# Altium PCB Sitara_Project_Rev_A.PcbDoc (part 1 of 5)
Units mm, origin at the board's own origin, x right, y up, seen from the top; angles counter-clockwise.
Board outline 120 x 85 mm, 8 copper layers (L1 (Sig), L2 (GND), L3 (PWR), L4 (Sig), L5 (GND), L6 (Sig), L7 (GND), L8 (Sig)), stack 1.188 mm thick; 515 components, 404 nets, 2043 pads, 82 vias.
Unrouted connection lines stored in the file: 1274.
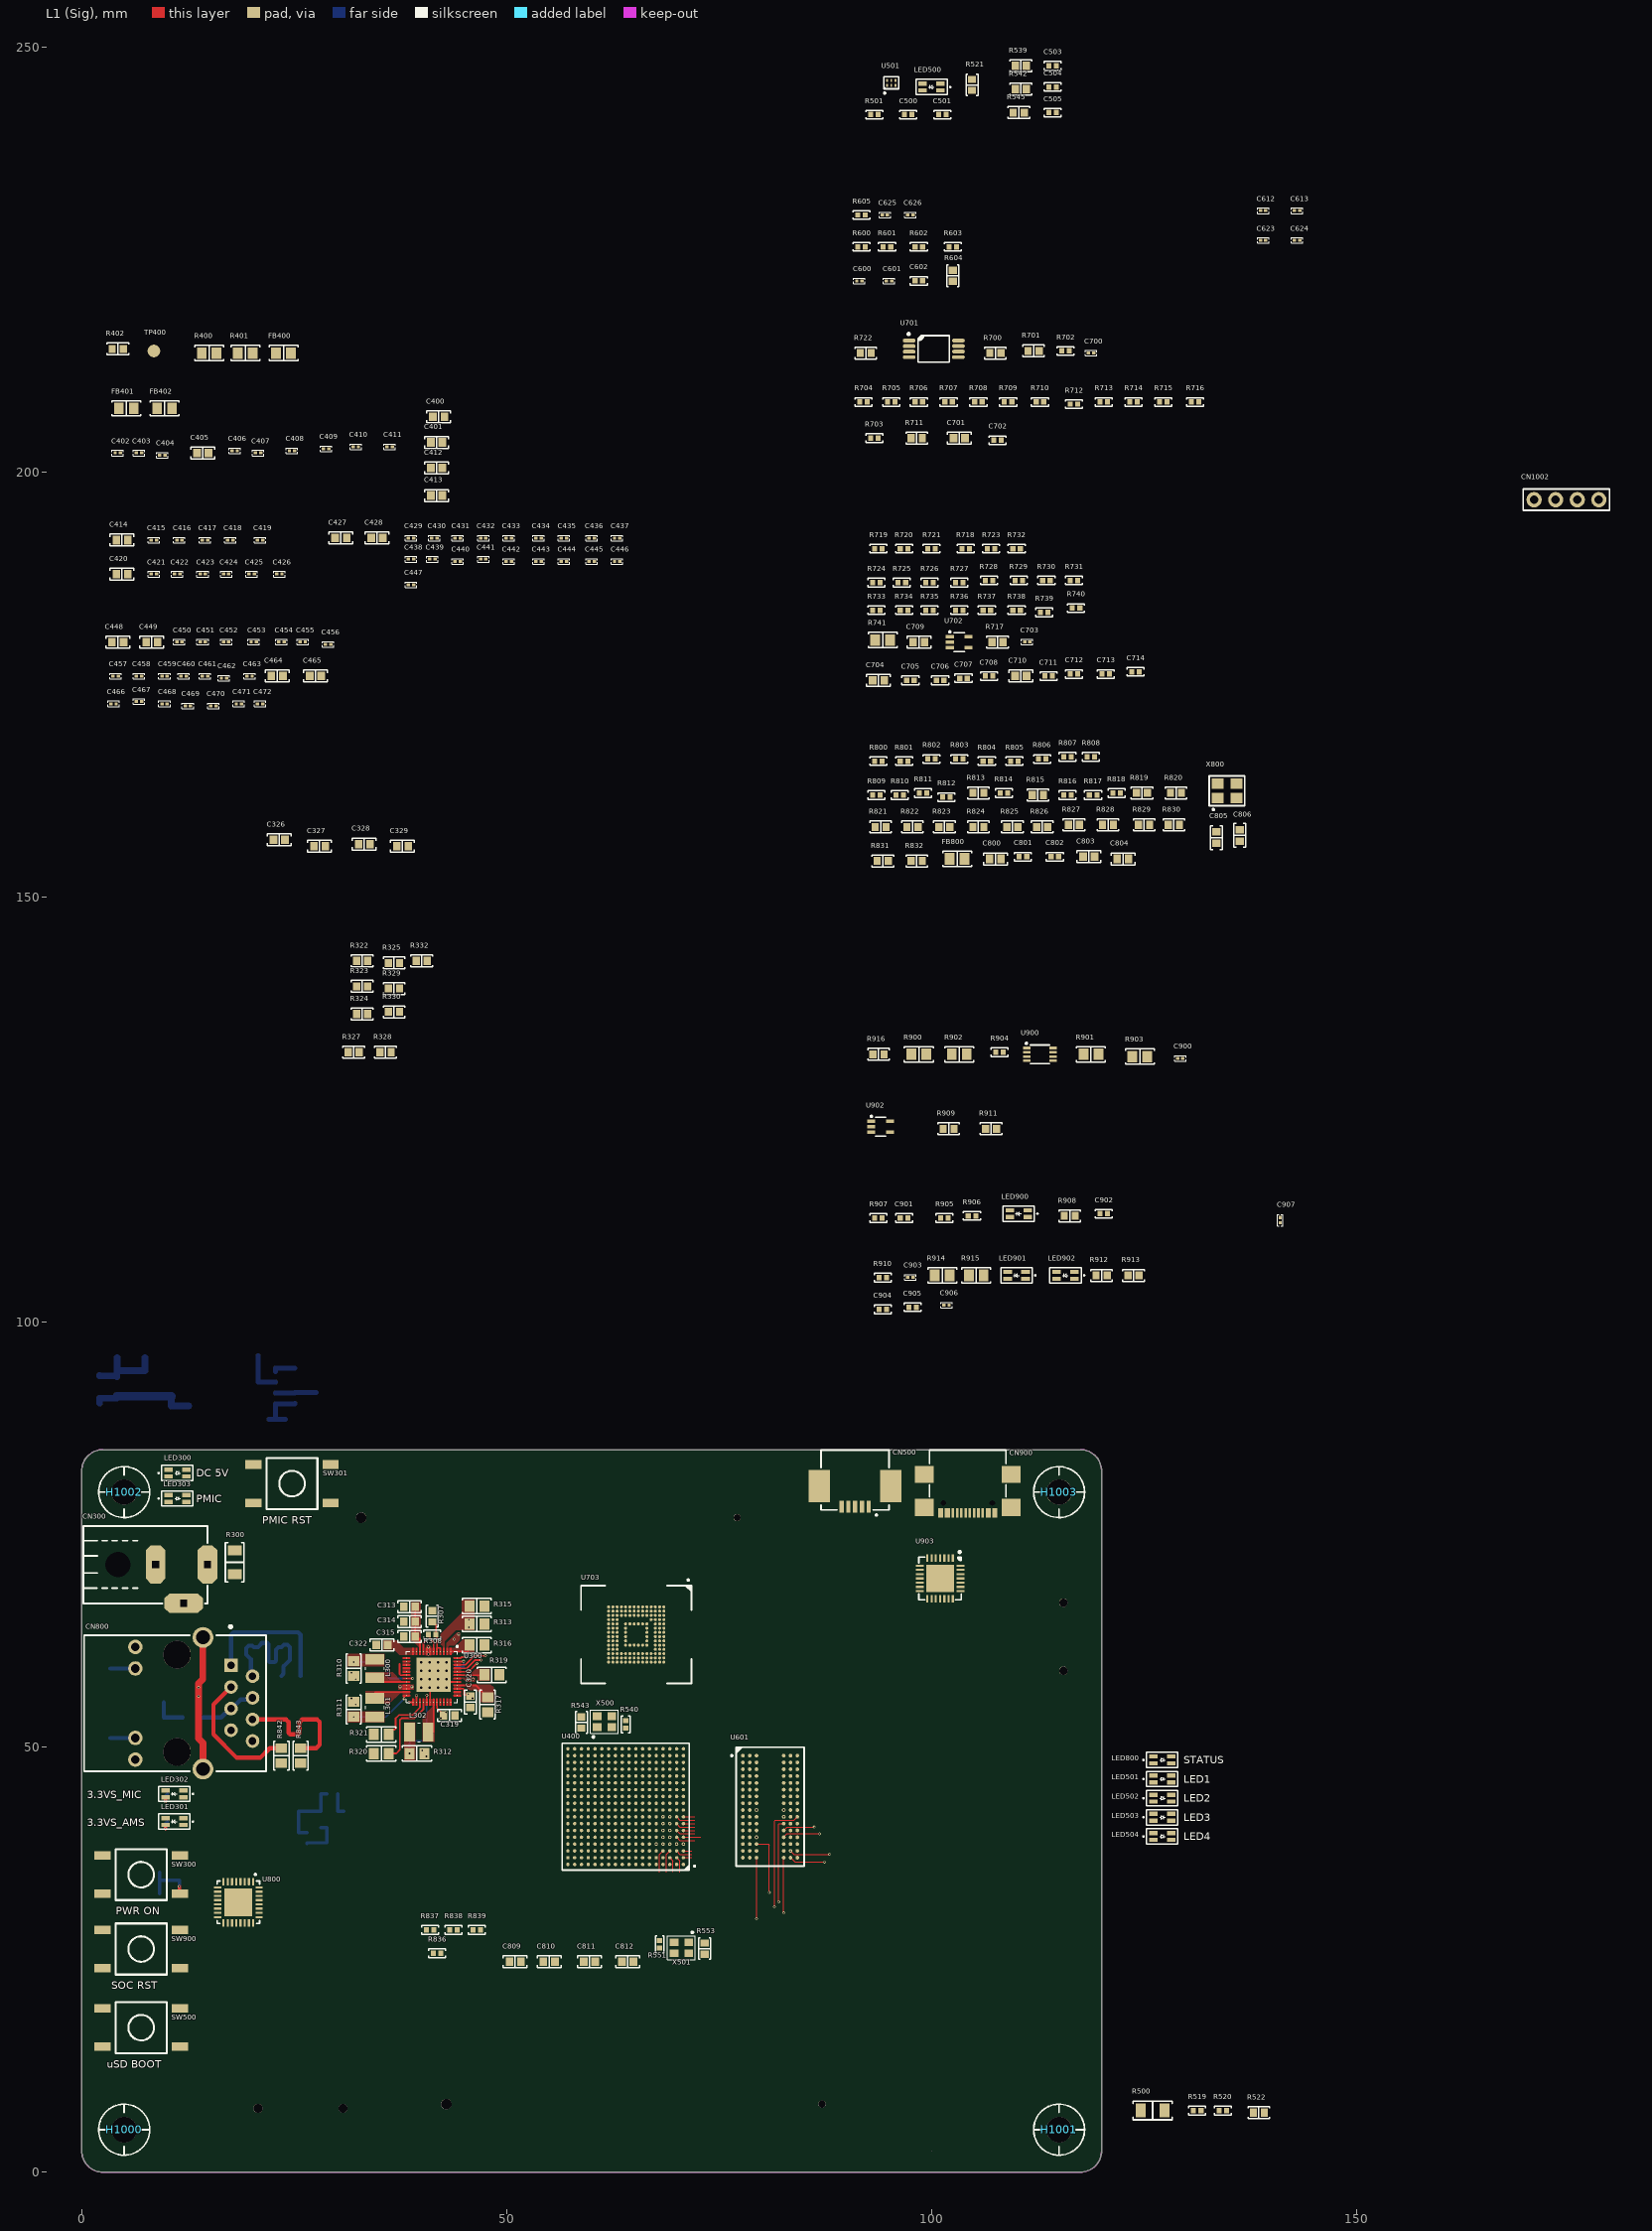
[diagram p0: L1 (Sig) view]
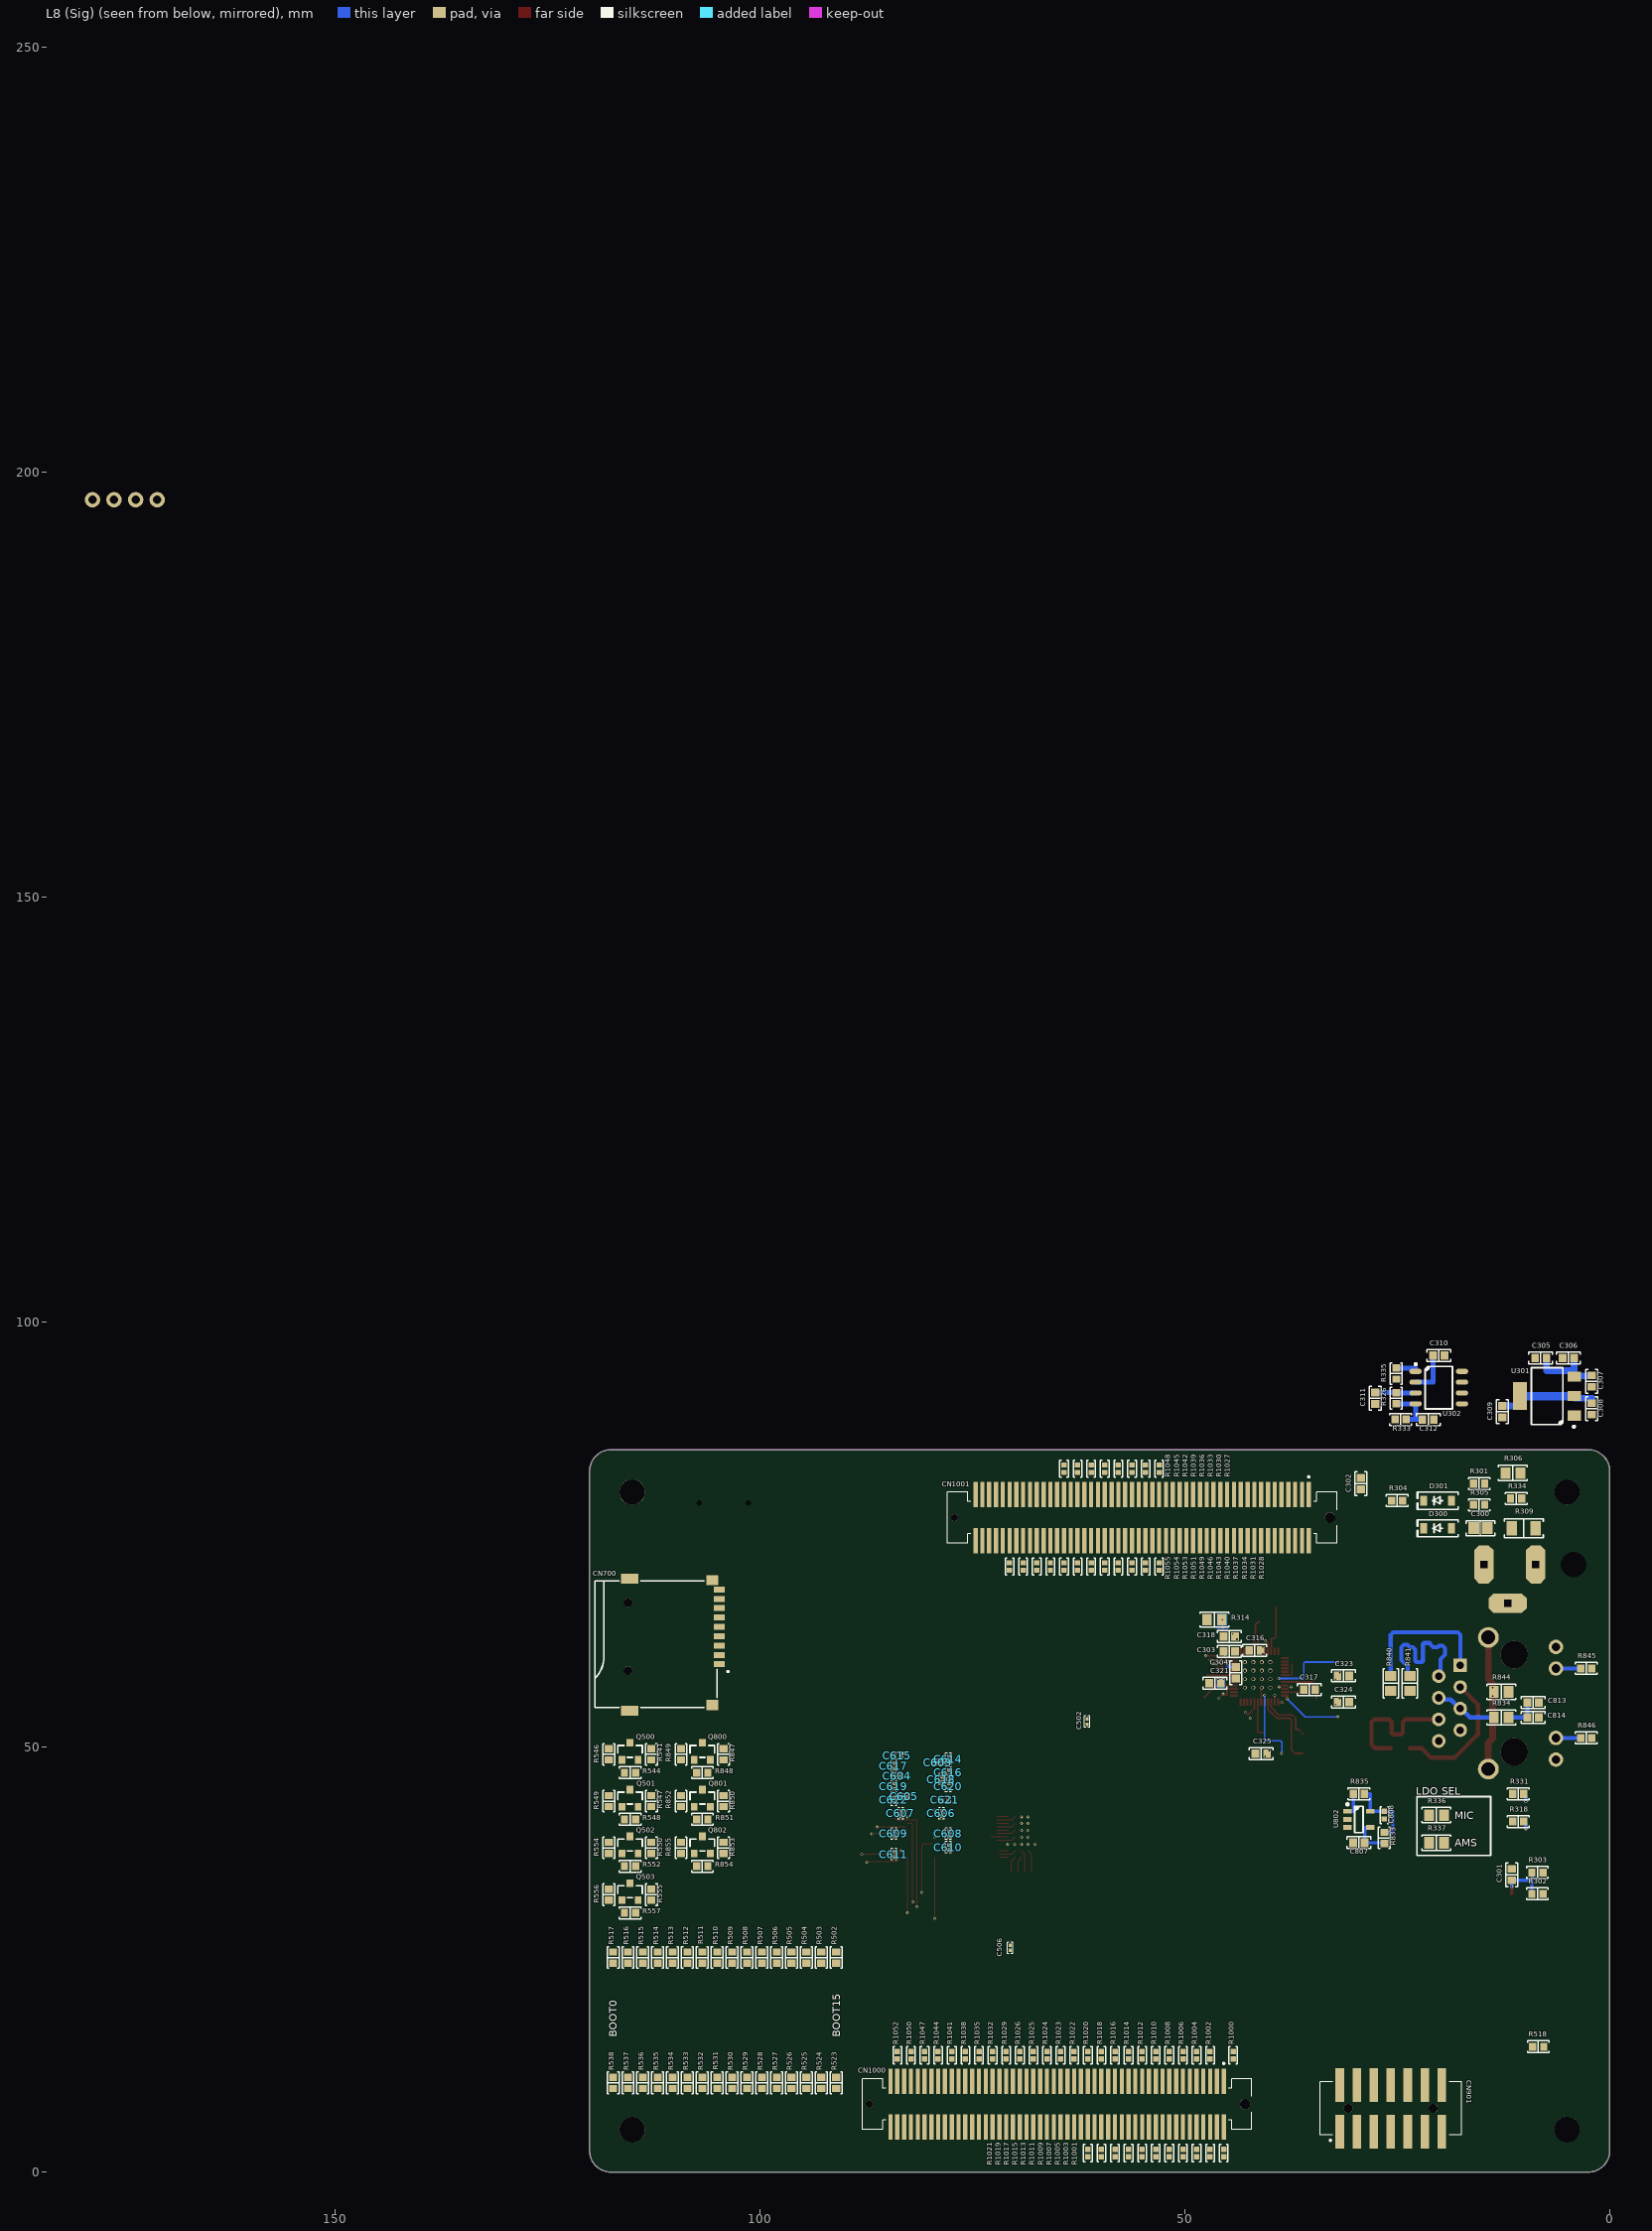
[diagram p1: L8 (Sig) view, seen from below]
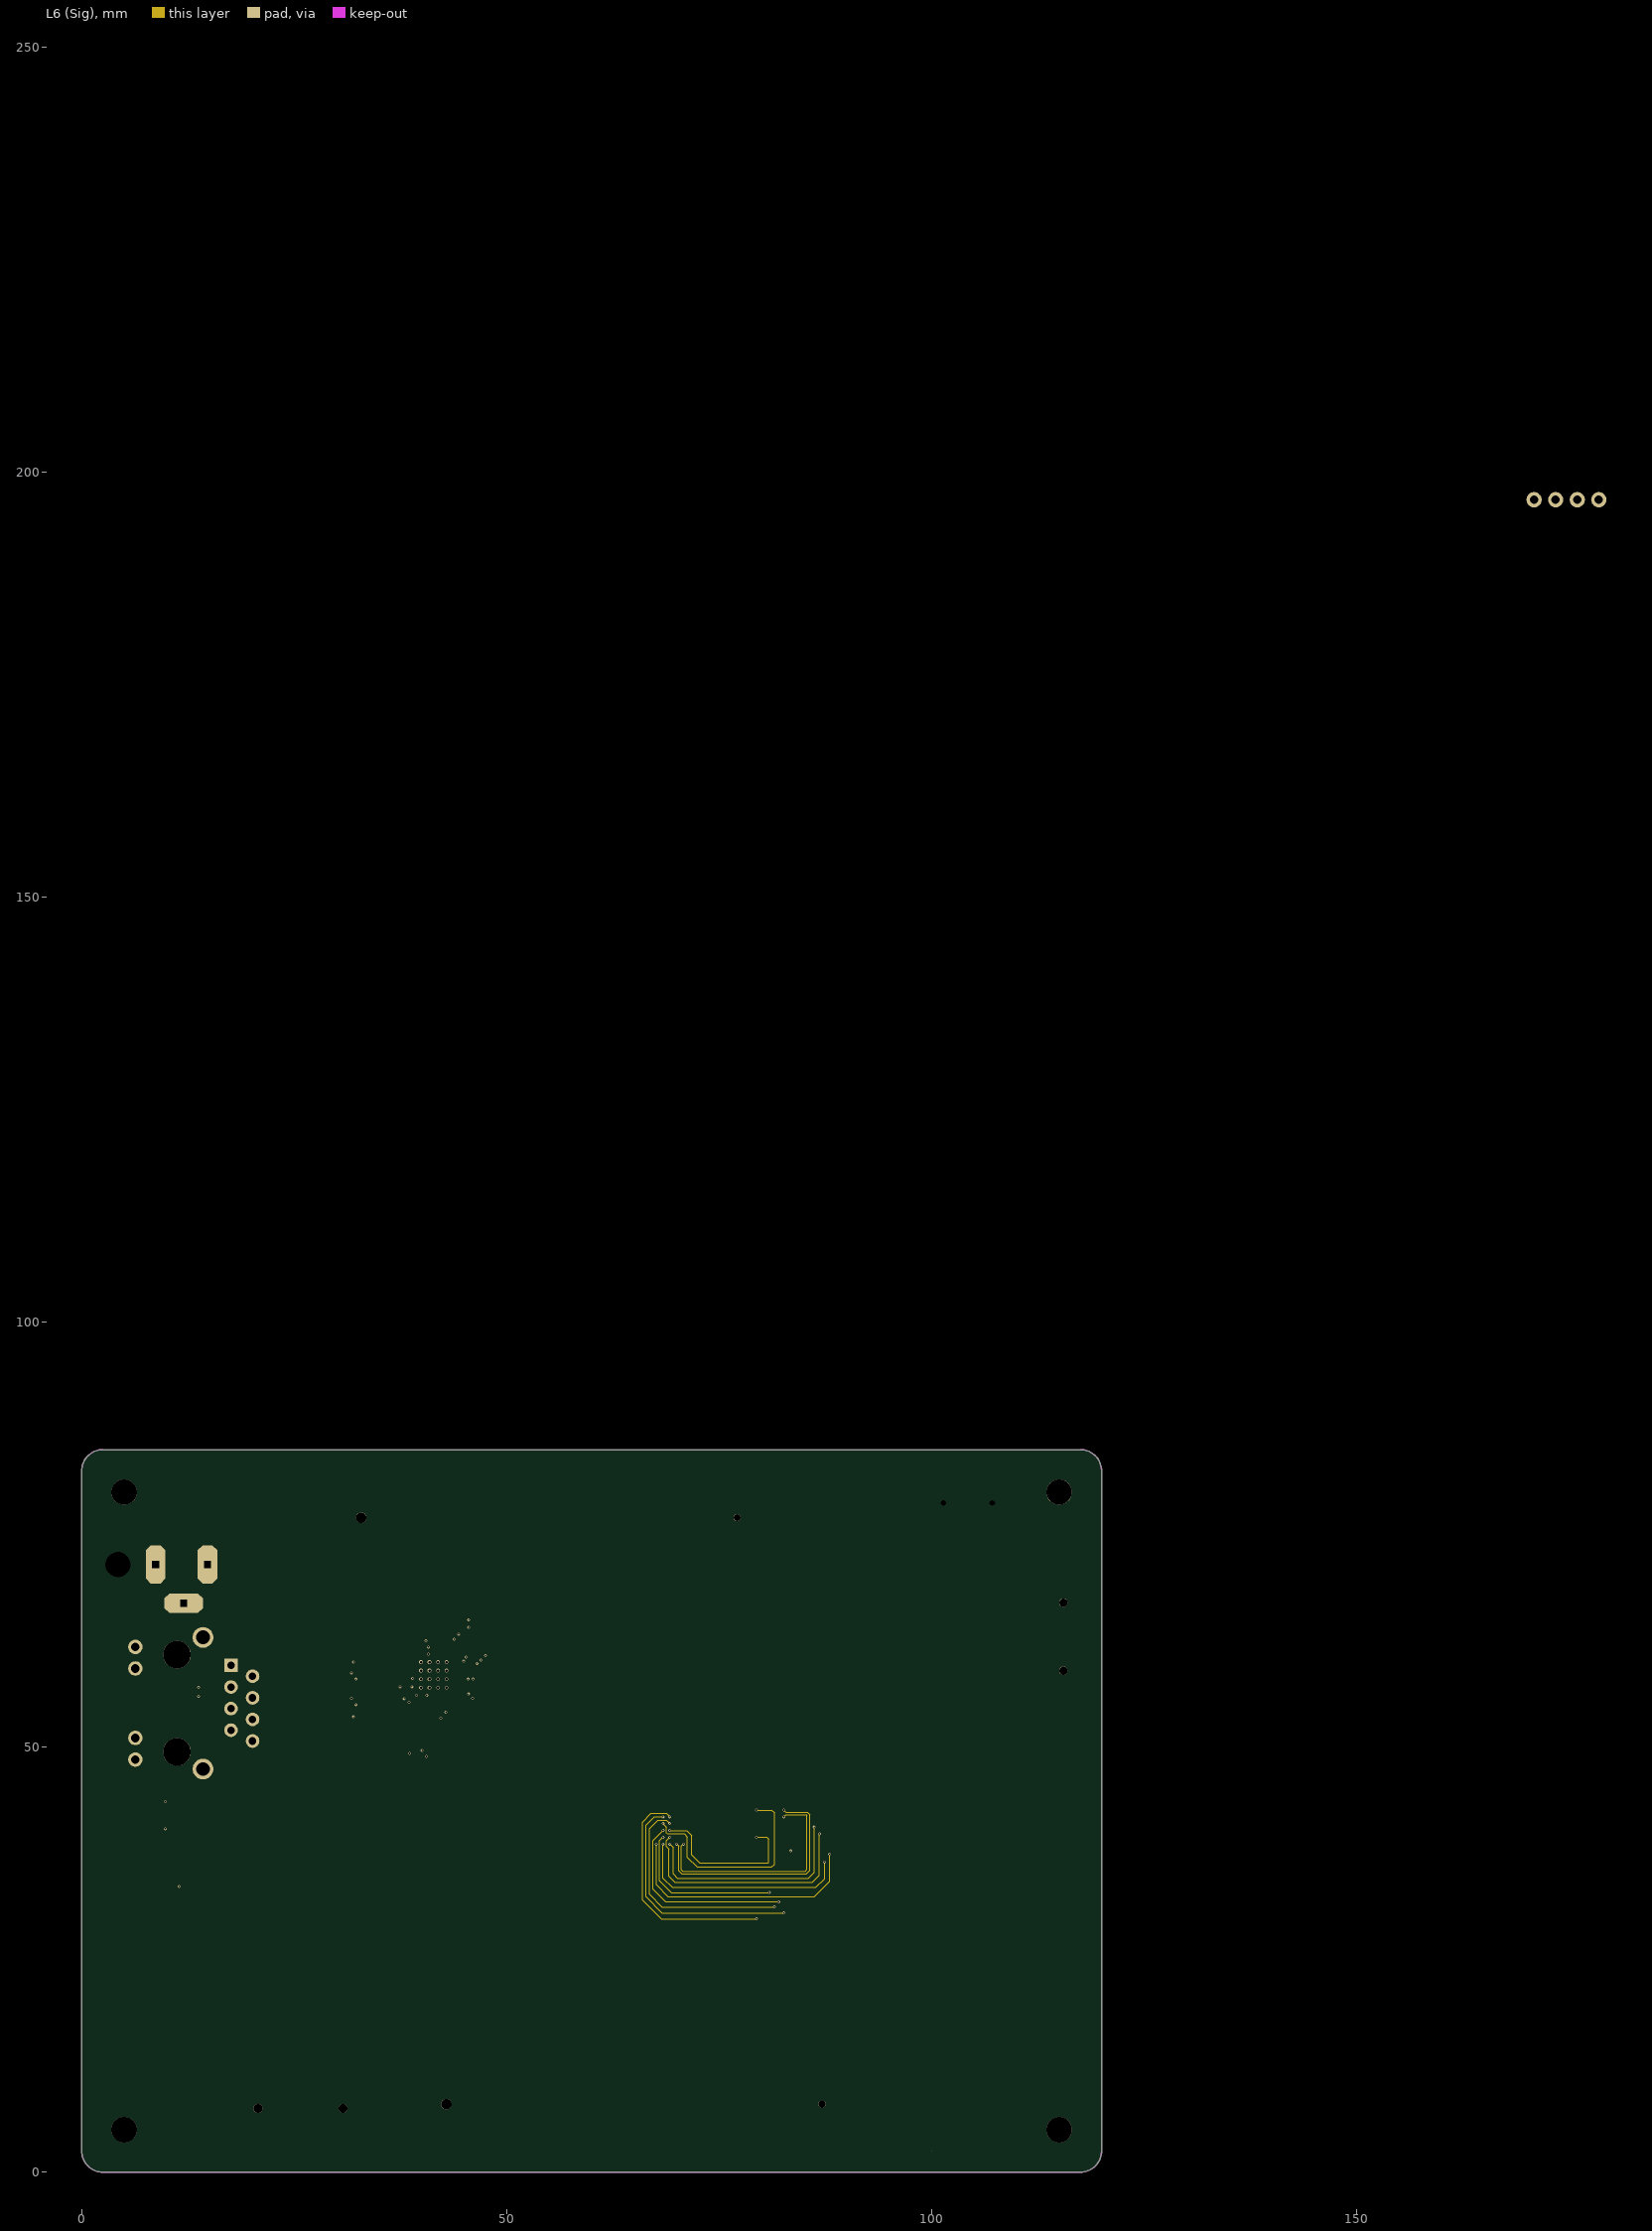
[diagram p2: L6 (Sig)]

## Layer stack, top to bottom
Top Mask: solder mask 0.015, Solder Resist, Dk 3.8
L1 (Sig): signal copper 0.035
Dielectric 1: prepreg 0.0764, 1080, Dk 3.91
L2 (GND): signal copper 0.0152
Core 1: core 0.1, FR-4, Dk 4.6
L3 (PWR): signal copper 0.0152
Dielectric 2: prepreg 0.2104, 7628, Dk 4.4
Dielectric 3: prepreg 0.0764, 1080, Dk 3.91
L4 (Sig): signal copper 0.0152
Core 2: core 0.1, FR-4, Dk 4.6
L5 (GND): signal copper 0.0152
Dielectric 4: prepreg 0.0764, 1080, Dk 3.91
Dielectric 5: prepreg 0.2104, 7628, Dk 4.4
L6 (Sig): signal copper 0.0152
Core 3: core 0.1, FR-4, Dk 4.6
L7 (GND): signal copper 0.0152
Dielectric 6: prepreg 0.0764, 1080, Dk 3.91
L8 (Sig): signal copper 0.035
Bottom Mask: solder mask 0.015, Solder Resist, Dk 3.8

## Board outline
2.5,0 cw(c2.5,2.5) 0,2.5 0,82.5 cw(c2.5,82.5) 2.5,85 117.5,85 cw(c117.5,82.5) 120,82.5 120,2.5 cw(c117.5,2.5) 117.5,0

## Design rules (kind name [scope] priority, off if disabled: settings)
BoardOutlineClearance [All] p1: gap=0.2 ignorepadtopadclearanceinfootprint=FALSE except(0.4: Arc-SplitBarrior Arc-SplitContinuation Track-SplitBarrior Track-SplitContinuation SMDPad-SplitBarrior SMDPad-SplitContinuation THPad-SplitBarrior THPad-SplitContinuation Via-SplitBarrior Via-SplitContinuation Fill-SplitBarrior Fill-SplitContinuation Poly-SplitBarrior Poly-SplitContinuation Region-SplitBarrior Region-SplitContinuation Text-SplitBarrior Text-SplitContinuation)
Clearance "Clearance Bottom Layer" [OnLayer('Bottom Layer')] p1: gap=0.203 ignorepadtopadclearanceinfootprint=TRUE except(0.254: Arc-Text Track-Text SMDPad-Text THPad-Text Via-Text Fill-Text Poly-Text Region-Text Text-Text)
Clearance "Clearance Top Layer" [OnLayer('Top Layer')] p2: gap=0.203 ignorepadtopadclearanceinfootprint=TRUE except(0.254: Arc-Text Track-Text SMDPad-Text THPad-Text Via-Text Fill-Text Poly-Text Region-Text Text-Text)
Clearance [All] p3: gap=0.2 ignorepadtopadclearanceinfootprint=FALSE except(0.1: Arc-Arc Arc-Track Arc-SMDPad Track-Track Track-SMDPad SMDPad-SMDPad; 0.127: Arc-Via Track-Via SMDPad-Via THPad-Via Via-Via; 0.198: Arc-Fill Arc-Poly Arc-Region Track-Fill Track-Poly Track-Region; 0.254: Arc-Text Track-Text SMDPad-Text THPad-Text Via-Text Fill-Text Fill-Hole Poly-Text Poly-Hole Region-Text Region-Hole Text-Text)
ComponentClearance [InComponent('C1000')] p1: gap=0.254 collisioncheckmode=3 verticalgap=0.254 showdistances=FALSE donotcheckwithout3dbody=TRUE
DiffPairsRouting [All] p1: maxlimit=0.254 minlimit=0.1 mostfreqgap=0.2 toplayer_minwidth=0.089 toplayer_maxwidth=0.4 toplayer_prefwidth=0.1 midlayer1_minwidth=0.089 midlayer1_maxwidth=0.4 midlayer1_prefwidth=0.1 midlayer2_minwidth=0.089 midlayer2_maxwidth=0.4 midlayer2_prefwidth=0.1 midlayer3_minwidth=0.089 midlayer3_maxwidth=0.4 midlayer3_prefwidth=0.1 midlayer4_minwidth=0.089 midlayer4_maxwidth=0.4 midlayer4_prefwidth=0.1 midlayer5_minwidth=0.089 midlayer5_maxwidth=0.4 midlayer5_prefwidth=0.1 midlayer6_minwidth=0.089 midlayer6_maxwidth=0.4 midlayer6_prefwidth=0.1 bottomlayer_minwidth=0.089 bottomlayer_maxwidth=0.4 bottomlayer_prefwidth=0.1 maxuncoupledlength=12.7
HoleSize [All] p1: absolutevalues=TRUE maxlimit=6.3 minlimit=0.2 maxpercent=80.000 minpercent=20.000
MatchedLengths MatchedLengths_DDR_CLOCKS_STROBES [InxSignalClass('ADDR_PP1') OR InxSignalClass('DATA_BL0') OR InxSignalClass('DATA_BL1')] p1: tolerance=0 checknetsindiffpair=TRUE checkdiffpairvsdiffpair=FALSE checkxsignals=FALSE checkothers=FALSE
MatchedLengths MatchedLengths_DATA_BL1_1 [InxSignalClass('DATA_BL1')] p2: tolerance=0 checknetsindiffpair=FALSE checkdiffpairvsdiffpair=TRUE checkxsignals=TRUE checkothers=TRUE
MatchedLengths MatchedLengths_DATA_BL0_1 [InxSignalClass('DATA_BL0')] p3: tolerance=0 checknetsindiffpair=FALSE checkdiffpairvsdiffpair=TRUE checkxsignals=TRUE checkothers=TRUE
MatchedLengths MatchedLengths_ADDR_PP1_1 [InxSignalClass('ADDR_PP1')] p4: tolerance=0 checknetsindiffpair=FALSE checkdiffpairvsdiffpair=TRUE checkxsignals=TRUE checkothers=TRUE
MatchedLengths MatchLengths_xSignals_U400_U601 [InxSignalClass('xSignals_U400_U601_MatchLengthsClass')] p5: tolerance=2.54 checknetsindiffpair=FALSE checkdiffpairvsdiffpair=TRUE checkxsignals=TRUE checkothers=TRUE
MatchedLengths "Schematic Matched Net Lengths_10" [InNetClass('MII1_TX')] p6: tolerance=25.4 checknetsindiffpair=FALSE checkdiffpairvsdiffpair=TRUE checkxsignals=TRUE checkothers=TRUE usedelayunits=TRUE delaytolerance=10.000000
MatchedLengths "Schematic Matched Net Lengths_9" [InNetClass('MII1_RX')] p7: tolerance=25.4 checknetsindiffpair=FALSE checkdiffpairvsdiffpair=TRUE checkxsignals=TRUE checkothers=TRUE usedelayunits=TRUE delaytolerance=10.000000
MatchedLengths "Schematic Matched Net Lengths_8" [InNet('PHY_TX_P')] p8: tolerance=25.4 checknetsindiffpair=TRUE checkdiffpairvsdiffpair=FALSE checkxsignals=FALSE checkothers=FALSE usedelayunits=TRUE delaytolerance=10.000000
MatchedLengths "Schematic Matched Net Lengths_7" [InNet('PHY_TX_N')] p9: tolerance=25.4 checknetsindiffpair=TRUE checkdiffpairvsdiffpair=FALSE checkxsignals=FALSE checkothers=FALSE usedelayunits=TRUE delaytolerance=10.000000
MatchedLengths "Schematic Matched Net Lengths_6" [InNetClass('MMC1_eMMC')] p10: tolerance=25.4 checknetsindiffpair=FALSE checkdiffpairvsdiffpair=TRUE checkxsignals=TRUE checkothers=TRUE usedelayunits=TRUE delaytolerance=10.000000
MatchedLengths "Schematic Matched Net Lengths_5" [InNetClass('DDR_BL0')] p11: tolerance=25.4 checknetsindiffpair=FALSE checkdiffpairvsdiffpair=TRUE checkxsignals=TRUE checkothers=TRUE usedelayunits=TRUE delaytolerance=10.000000
MatchedLengths "Schematic Matched Net Lengths_4" [InNetClass('MMC0_MICRO_SD')] p12: tolerance=25.4 checknetsindiffpair=FALSE checkdiffpairvsdiffpair=TRUE checkxsignals=TRUE checkothers=TRUE usedelayunits=TRUE delaytolerance=10.000000
MatchedLengths "Schematic Matched Net Lengths_3" [InNetClass('DDR_BL1')] p13: tolerance=25.4 checknetsindiffpair=FALSE checkdiffpairvsdiffpair=TRUE checkxsignals=TRUE checkothers=TRUE usedelayunits=TRUE delaytolerance=10.000000
MatchedLengths "Schematic Matched Net Lengths_2" [InNet('PHY_RX_P')] p14: tolerance=25.4 checknetsindiffpair=TRUE checkdiffpairvsdiffpair=FALSE checkxsignals=FALSE checkothers=FALSE usedelayunits=TRUE delaytolerance=10.000000
MatchedLengths "Schematic Matched Net Lengths_1" [InNet('PHY_RX_N')] p15: tolerance=25.4 checknetsindiffpair=TRUE checkdiffpairvsdiffpair=FALSE checkxsignals=FALSE checkothers=FALSE usedelayunits=TRUE delaytolerance=10.000000
MatchedLengths "Schematic Matched Net Lengths" [InNetClass('DDR_ACC')] p16: tolerance=25.4 checknetsindiffpair=FALSE checkdiffpairvsdiffpair=TRUE checkxsignals=TRUE checkothers=TRUE usedelayunits=TRUE delaytolerance=10.000000
MatchedLengths MatchedLengths_DDR_CLOCKS_STROBES2 [InxSignalClass('ADDR_PP1_1') OR InxSignalClass('DATA_BL0') OR InxSignalClass('DATA_BL1')] p17: tolerance=0 checknetsindiffpair=TRUE checkdiffpairvsdiffpair=FALSE checkxsignals=FALSE checkothers=FALSE usedelayunits=TRUE delaytolerance=1.000000
MatchedLengths MatchedLengths_DATA_BL1 [InxSignalClass('DATA_BL1')] p18: tolerance=0 checknetsindiffpair=FALSE checkdiffpairvsdiffpair=TRUE checkxsignals=TRUE checkothers=TRUE usedelayunits=TRUE delaytolerance=10.000000
MatchedLengths MatchedLengths_DATA_BL0 [InxSignalClass('DATA_BL0')] p19: tolerance=0 checknetsindiffpair=FALSE checkdiffpairvsdiffpair=TRUE checkxsignals=TRUE checkothers=TRUE usedelayunits=TRUE delaytolerance=10.000000
MatchedLengths MatchedLengths_ADDR_PP2 [InxSignalClass('ADDR_PP2')] p20: tolerance=0 checknetsindiffpair=FALSE checkdiffpairvsdiffpair=TRUE checkxsignals=TRUE checkothers=TRUE usedelayunits=TRUE delaytolerance=10.000000
MatchedLengths MatchedLengths_DDR_CLOCKS_STROBES1 [InxSignalClass('ADDR_PP1') OR InxSignalClass('DATA_BL0') OR InxSignalClass('DATA_BL1')] p21: tolerance=0 checknetsindiffpair=TRUE checkdiffpairvsdiffpair=FALSE checkxsignals=FALSE checkothers=FALSE usedelayunits=TRUE delaytolerance=1.000000
MatchedLengths MatchedLengths_DATA_BL3 [InxSignalClass('DATA_BL3')] p22: tolerance=0 checknetsindiffpair=FALSE checkdiffpairvsdiffpair=TRUE checkxsignals=TRUE checkothers=TRUE usedelayunits=TRUE delaytolerance=10.000000
MatchedLengths MatchedLengths_DATA_BL2 [InxSignalClass('DATA_BL2')] p23: tolerance=0 checknetsindiffpair=FALSE checkdiffpairvsdiffpair=TRUE checkxsignals=TRUE checkothers=TRUE usedelayunits=TRUE delaytolerance=10.000000
MatchedLengths MatchedLengths_ADDR_PP1 [InxSignalClass('ADDR_PP1')] p24: tolerance=0 checknetsindiffpair=FALSE checkdiffpairvsdiffpair=TRUE checkxsignals=TRUE checkothers=TRUE usedelayunits=TRUE delaytolerance=10.000000
MinimumAnnularRing [All] p1: minimumring=0.076
MinimumSolderMaskSliver [All] p1: minsoldermaskwidth=0.1
PolygonConnect Default [All] p1: connectstyle=Direct reliefconductorwidth=0.508 reliefentries=4 polygonreliefangle="90 Angle" airgapwidth=0.254
RoutingCorners [All] p1: cornerstyle=Round minsetback=2.54 maxsetback=2.54
RoutingTopology RoutingTopology_DDRAddressAndControls [InNetClass('DDR_AddressAndControls')] p1: topology=Daisy_Simple
RoutingTopology [All] p2: topology=Shortest
RoutingVias [All] p1: holewidth=0.2 width=0.35 viastyle="Through Hole" minholewidth=0.2 minwidth=0.25 maxholewidth=1 maxwidth=2
SilkToSilkClearance [All] p1: silktosilkclearance=0.1
SilkToSolderMaskClearance [IsPad] p1: minsilkscreentomaskgap=0.1 clearancetoexposedcopper=TRUE
SolderMaskExpansion [All] p1: expansion=0.102 istentingtop=FALSE
Width [All] p1: maxlimit=2.54 minlimit=0.089 preferedwidth=0.2
22 further rules are at their usual default settings.

## Classes and differential pairs
net class MII1_TX: MII1_TXCLK MII1_TXD0 MII1_TXD1 MII1_TXD2 MII1_TXD3 MII1_TXEN
net class MII1_RX: PHY_RXCLK PHY_RXD0/MODE0 PHY_RXD1/MODE1 PHY_RXD2/RMIISEL PHY_RXD3/PHYAD2 PHY_RXDV PHY_RXER/PHYAD0
differential pair class USB_Mini_B_DIFF90: USB0_D
differential pair class USB9_DIFF90: USB9_D
differential pair class PHY_TX: PHY_TX
differential pair class PHY_RX: PHY_RX
differential pair class DIFF_DDR_DQS1: DDR_DQS1
differential pair class DIFF_DDR_DQS0: DDR_DQS0
differential pair class DIFF_DDR_CK: DDR_CK
net class MMC1_eMMC: eMMC_DAT0 eMMC_DAT1 eMMC_DAT2 eMMC_DAT3 eMMC_DAT4 eMMC_DAT5 eMMC_DAT6 eMMC_DAT7 MMC1_CLK MMC1_CMD
net class MMC0_MICRO_SD: MICRO_SD_CLK MICRO_SD_CMD MICRO_SD_DAT0 MICRO_SD_DAT1 MICRO_SD_DAT2 MICRO_SD_DAT3
net class DDR_BL1: DDR_DQ8 DDR_DQ9 DDR_DQ10 DDR_DQ11 DDR_DQ12 DDR_DQ13 DDR_DQ14 DDR_DQ15 DDR_DQM1 DDR_DQS1_N DDR_DQS1_P
net class DDR_BL0: DDR_DQ0 DDR_DQ1 DDR_DQ2 DDR_DQ3 DDR_DQ4 DDR_DQ5 DDR_DQ6 DDR_DQ7 DDR_DQM0 DDR_DQS0_N DDR_DQS0_P
net class DDR_ACC: DDR_A0 DDR_A1 DDR_A2 DDR_A3 DDR_A4 DDR_A5 DDR_A6 DDR_A7 DDR_A8 DDR_A9 DDR_A10 DDR_A11 DDR_A12 DDR_A13 DDR_A14 DDR_A15 DDR_BA0 DDR_BA1 DDR_BA2 DDR_CK_N DDR_CK_P DDR_CKE DDR_NCAS DDR_NCS DDR_NRAS DDR_NRST DDR_NWE DDR_ODT
differential pair USB9_D: +USB9_D_P -USB9_D_N
differential pair USB0_D: +USB0_D_P -USB0_D_N
differential pair PHY_TX: +PHY_TX_P -PHY_TX_N
differential pair PHY_RX: +PHY_RX_P -PHY_RX_N
differential pair DDR_DQS1: +DDR_DQS1_P -DDR_DQS1_N
differential pair DDR_DQS0: +DDR_DQS0_P -DDR_DQS0_N
differential pair DDR_CK: +DDR_CK_P -DDR_CK_N

## Components (designator, comment, footprint, x,y, rotation, side; value= is the part's Value field where it differs from the comment)
C300 "22uF/25V/2012" "CAP 2012 (0805_INCH)" 15.2,75.75 r0 bottom
C301 "100nF/50V/1608" "CAP 1608 (0603_INCH)" 11.5,35 r270 bottom
C302 "100nF/50V/1608" "CAP 1608 (0603_INCH)" 29.25,81 r270 bottom
C303 "100nF/50V/1608" "CAP 1608 (0603_INCH)" 44.75,61.25 r0 bottom
C304 "10uF/25V/1608" "CAP 1608 (0603_INCH)" 44,58.75 r90 bottom
C305 "10uF/10V/1608" "CAP 1608 (0603_INCH)" 8.1,95.8 r180 bottom
C306 "2.2uF/16V/1608" "CAP 1608 (0603_INCH)" 4.85,95.8 r180 bottom
C307 "100nF/50V/1608" "CAP 1608 (0603_INCH)" 2.1,93.05 r90 bottom
C308 "100nF/50V/1608" "CAP 1608 (0603_INCH)" 2.1,89.8 r90 bottom
C309 "10uF/10V/1608" "CAP 1608 (0603_INCH)" 12.6,89.475 r90 bottom
C310 "2.2uF/16V/1608" "CAP 1608 (0603_INCH)" 20.1,96.05 r0 bottom
C311 "100nF/50V/1608" "CAP 1608 (0603_INCH)" 27.6,91.05 r90 bottom
C312 "470pF/50V/1608" "CAP 1608 (0603_INCH)" 21.35,88.55 r0 bottom
C313 "10uF/25V/1608" "CAP 1608 (0603_INCH)" 38.575,66.5 r0 top
C314 "1uF/50V/1608" "CAP 1608 (0603_INCH)" 38.575,64.75 r0 top
C315 "100nF/50V/1608" "CAP 1608 (0603_INCH)" 38.575,63 r0 top
C316 "10uF/25V/1608" "CAP 1608 (0603_INCH)" 41.75,61.4 r180 bottom
C317 "10uF/25V/1608" "CAP 1608 (0603_INCH)" 35.325,56.75 r0 bottom
C318 "10uF/25V/1608" "CAP 1608 (0603_INCH)" 44.75,63 r180 bottom
C319 "10uF/25V/1608" "CAP 1608 (0603_INCH)" 43.25,53.75 r180 top
C320 "10uF/25V/1608" "CAP 1608 (0603_INCH)" 45.75,55.325 r90 top
C321 "10uF/25V/1608" "CAP 1608 (0603_INCH)" 46.425,57.5 r180 bottom
C322 "10uF/25V/1608" "CAP 1608 (0603_INCH)" 35.325,62 r0 top
C323 "10uF/25V/1608" "CAP 1608 (0603_INCH)" 31.325,58.375 r0 bottom
C324 "10uF/25V/1608" "CAP 1608 (0603_INCH)" 31.325,55.32 r0 bottom
C325 "10uF/25V/1608" "CAP 1608 (0603_INCH)" 40.995,49.25 r180 bottom
C326 "2.2uF/16V/1608" "CAP 1608 (0603_INCH)" 23.25,156.75 r180 top
C327 "2.2uF/16V/1608" "CAP 1608 (0603_INCH)" 28,156 r180 top
C328 "10uF/25V/1608" "CAP 1608 (0603_INCH)" 33.25,156.25 r180 top
C329 "10uF/25V/1608" "CAP 1608 (0603_INCH)" 37.75,156 r180 top
C400 "1uF/50V/1608" "CAP 1608 (0603_INCH)" 42,206.5 r180 top
C401 "1uF/50V/1608" "CAP 1608 (0603_INCH)" 41.75,203.5 r180 top
C402 "100nF/25V/0603" "CAP 0603 (0201_INCH)" 4.25,202.25 r180 top
C403 "100nF/25V/0603" "CAP 0603 (0201_INCH)" 6.75,202.25 r180 top
C404 "100nF/25V/0603" "CAP 0603 (0201_INCH)" 9.5,202 r180 top
C405 "1uF/50V/1608" "CAP 1608 (0603_INCH)" 14.25,202.25 r180 top
C406 "100nF/25V/0603" "CAP 0603 (0201_INCH)" 18,202.5 r180 top
C407 "100nF/25V/0603" "CAP 0603 (0201_INCH)" 20.75,202.25 r180 top
C408 "100nF/25V/0603" "CAP 0603 (0201_INCH)" 24.75,202.5 r180 top
C409 "100nF/25V/0603" "CAP 0603 (0201_INCH)" 28.75,202.75 r180 top
C410 "100nF/25V/0603" "CAP 0603 (0201_INCH)" 32.25,203 r180 top
C411 "100nF/25V/0603" "CAP 0603 (0201_INCH)" 36.25,203 r180 top
C412 "1uF/50V/1608" "CAP 1608 (0603_INCH)" 41.75,200.5 r180 top
C413 "1uF/50V/1608" "CAP 1608 (0603_INCH)" 41.75,197.25 r180 top
C414 "10uF/25V/1608" "CAP 1608 (0603_INCH)" 4.75,192 r180 top
C415 "100nF/25V/0603" "CAP 0603 (0201_INCH)" 8.5,192 r180 top
C416 "100nF/25V/0603" "CAP 0603 (0201_INCH)" 11.5,192 r180 top
C417 "100nF/25V/0603" "CAP 0603 (0201_INCH)" 14.5,192 r180 top
C418 "100nF/25V/0603" "CAP 0603 (0201_INCH)" 17.5,192 r180 top
C419 "100nF/25V/0603" "CAP 0603 (0201_INCH)" 21,192 r180 top
C420 "10uF/25V/1608" "CAP 1608 (0603_INCH)" 4.75,188 r180 top
C421 "100nF/25V/0603" "CAP 0603 (0201_INCH)" 8.5,188 r180 top
C422 "100nF/25V/0603" "CAP 0603 (0201_INCH)" 11.25,188 r180 top
C423 "100nF/25V/0603" "CAP 0603 (0201_INCH)" 14.25,188 r180 top
C424 "100nF/25V/0603" "CAP 0603 (0201_INCH)" 17,188 r180 top
C425 "100nF/25V/0603" "CAP 0603 (0201_INCH)" 20,188 r180 top
C426 "100nF/25V/0603" "CAP 0603 (0201_INCH)" 23.25,188 r180 top
C427 "10uF/25V/1608" "CAP 1608 (0603_INCH)" 30.5,192.25 r180 top
C428 "10uF/25V/1608" "CAP 1608 (0603_INCH)" 34.75,192.25 r180 top
C429 "100nF/25V/0603" "CAP 0603 (0201_INCH)" 38.75,192.25 r180 top
C430 "100nF/25V/0603" "CAP 0603 (0201_INCH)" 41.5,192.25 r180 top
C431 "100nF/25V/0603" "CAP 0603 (0201_INCH)" 44.25,192.25 r180 top
C432 "100nF/25V/0603" "CAP 0603 (0201_INCH)" 47.25,192.25 r180 top
C433 "100nF/25V/0603" "CAP 0603 (0201_INCH)" 50.25,192.25 r180 top
C434 "100nF/25V/0603" "CAP 0603 (0201_INCH)" 53.75,192.25 r180 top
C435 "100nF/25V/0603" "CAP 0603 (0201_INCH)" 56.75,192.25 r180 top
C436 "100nF/25V/0603" "CAP 0603 (0201_INCH)" 60,192.25 r180 top
C437 "100nF/25V/0603" "CAP 0603 (0201_INCH)" 63,192.25 r180 top
C438 "100nF/25V/0603" "CAP 0603 (0201_INCH)" 38.75,189.75 r180 top
C439 "100nF/25V/0603" "CAP 0603 (0201_INCH)" 41.25,189.75 r180 top
C440 "100nF/25V/0603" "CAP 0603 (0201_INCH)" 44.25,189.5 r180 top
C441 "100nF/25V/0603" "CAP 0603 (0201_INCH)" 47.25,189.75 r180 top
C442 "100nF/25V/0603" "CAP 0603 (0201_INCH)" 50.25,189.5 r180 top
C443 "100nF/25V/0603" "CAP 0603 (0201_INCH)" 53.75,189.5 r180 top
C444 "100nF/25V/0603" "CAP 0603 (0201_INCH)" 56.75,189.5 r180 top
C445 "100nF/25V/0603" "CAP 0603 (0201_INCH)" 60,189.5 r180 top
C446 "100nF/25V/0603" "CAP 0603 (0201_INCH)" 63,189.5 r180 top
C447 "100nF/25V/0603" "CAP 0603 (0201_INCH)" 38.75,186.75 r180 top
C448 "10uF/25V/1608" "CAP 1608 (0603_INCH)" 4.25,180 r180 top
C449 "10uF/25V/1608" "CAP 1608 (0603_INCH)" 8.25,180 r180 top
C450 "100nF/25V/0603" "CAP 0603 (0201_INCH)" 11.5,180 r180 top
C451 "100nF/25V/0603" "CAP 0603 (0201_INCH)" 14.25,180 r180 top
C452 "100nF/25V/0603" "CAP 0603 (0201_INCH)" 17,180 r180 top
C453 "100nF/25V/0603" "CAP 0603 (0201_INCH)" 20.25,180 r180 top
C454 "100nF/25V/0603" "CAP 0603 (0201_INCH)" 23.5,180 r180 top
C455 "100nF/25V/0603" "CAP 0603 (0201_INCH)" 26,180 r180 top
C456 "100nF/25V/0603" "CAP 0603 (0201_INCH)" 29,179.75 r180 top
C457 "100nF/25V/0603" "CAP 0603 (0201_INCH)" 4,176 r180 top
C458 "100nF/25V/0603" "CAP 0603 (0201_INCH)" 6.75,176 r180 top
C459 "100nF/25V/0603" "CAP 0603 (0201_INCH)" 9.75,176 r180 top
C460 "100nF/25V/0603" "CAP 0603 (0201_INCH)" 12,176 r180 top
C461 "100nF/25V/0603" "CAP 0603 (0201_INCH)" 14.5,176 r180 top
C462 "100nF/25V/0603" "CAP 0603 (0201_INCH)" 16.75,175.75 r180 top
C463 "100nF/25V/0603" "CAP 0603 (0201_INCH)" 19.75,176 r180 top
C464 "10uF/25V/1608" "CAP 1608 (0603_INCH)" 23,176 r180 top
C465 "10uF/25V/1608" "CAP 1608 (0603_INCH)" 27.5,176 r180 top
C466 "100nF/25V/0603" "CAP 0603 (0201_INCH)" 3.75,172.75 r180 top
C467 "100nF/25V/0603" "CAP 0603 (0201_INCH)" 6.75,173 r180 top
C468 "100nF/25V/0603" "CAP 0603 (0201_INCH)" 9.75,172.75 r180 top
C469 "100nF/25V/0603" "CAP 0603 (0201_INCH)" 12.5,172.5 r180 top
C470 "100nF/25V/0603" "CAP 0603 (0201_INCH)" 15.5,172.5 r180 top
C471 "100nF/25V/0603" "CAP 0603 (0201_INCH)" 18.5,172.75 r180 top
C472 "100nF/25V/0603" "CAP 0603 (0201_INCH)" 21,172.75 r180 top
C500 "100nF/50V/1005" "CAP 1005 (0402_INCH)" 97.25,242.05 r180 top
C501 "4.7uF/10V/1005" "CAP 1005 (0402_INCH)" 101.25,242.05 r180 top
C502 "100nF/25V/0603" "CAP 0603 (0201_INCH)" 61.5,53 r90 bottom
C503 "100nF/50V/1005" "CAP 1005 (0402_INCH)" 114.25,247.8 r180 top
C504 "100nF/50V/1005" "CAP 1005 (0402_INCH)" 114.25,245.3 r180 top
C505 "1nF/50V/1005" "CAP 1005 (0402_INCH)" 114.25,242.3 r180 top
C506 "100nF/25V/0603" "CAP 0603 (0201_INCH)" 70.55,26.39 r270 bottom
C600 "47nF/16V/0603" "CAP 0603 (0201_INCH)" 91.5,222.5 r180 top
C601 "47nF/16V/0603" "CAP 0603 (0201_INCH)" 95,222.5 r180 top
C602 "1nF/50V/1005" "CAP 1005 (0402_INCH)" 98.5,222.5 r180 top
C603 "47nF/16V/0603" "CAP 0603 (0201_INCH)" 79,48.2 r180 bottom locked
C604 "47nF/16V/0603" "CAP 0603 (0201_INCH)" 83.8,46.6 r0 bottom
C605 "47nF/16V/0603" "CAP 0603 (0201_INCH)" 83,44.2 r180 bottom
C606 "47nF/16V/0603" "CAP 0603 (0201_INCH)" 78.6,42.2 r270 bottom
C607 "47nF/16V/0603" "CAP 0603 (0201_INCH)" 83.4,42.2 r270 bottom
C608 "47nF/16V/0603" "CAP 0603 (0201_INCH)" 77.8,39.8 r270 bottom
C609 "47nF/16V/0603" "CAP 0603 (0201_INCH)" 84.2,39.8 r270 bottom
C610 "47nF/16V/0603" "CAP 0603 (0201_INCH)" 77.8,38.2 r270 bottom
C611 "47nF/16V/0603" "CAP 0603 (0201_INCH)" 84.2,37.4 r90 bottom
C612 "47nF/16V/0603" "CAP 0603 (0201_INCH)" 139,230.75 r180 top
C613 "47nF/16V/0603" "CAP 0603 (0201_INCH)" 143,230.75 r180 top
C614 "47nF/16V/0603" "CAP 0603 (0201_INCH)" 77.8,48.6 r90 bottom
C615 "47nF/16V/0603" "CAP 0603 (0201_INCH)" 83.8,49 r180 bottom
C616 "47nF/16V/0603" "CAP 0603 (0201_INCH)" 77.8,47 r90 bottom
C617 "47nF/16V/0603" "CAP 0603 (0201_INCH)" 84.2,47.8 r270 bottom
C618 "47nF/16V/0603" "CAP 0603 (0201_INCH)" 78.6,46.2 r90 bottom
C619 "47nF/16V/0603" "CAP 0603 (0201_INCH)" 84.2,45.4 r90 bottom
C620 "47nF/16V/0603" "CAP 0603 (0201_INCH)" 77.8,45.4 r270 bottom
C621 "47nF/16V/0603" "CAP 0603 (0201_INCH)" 78.2,43.8 r0 bottom
C622 "47nF/16V/0603" "CAP 0603 (0201_INCH)" 84.2,43.8 r270 bottom
C623 "47nF/16V/0603" "CAP 0603 (0201_INCH)" 139,227.25 r180 top
C624 "47nF/16V/0603" "CAP 0603 (0201_INCH)" 143,227.25 r180 top
C625 "47nF/16V/0603" "CAP 0603 (0201_INCH)" 94.5,230.25 r180 top
C626 "47nF/16V/0603" "CAP 0603 (0201_INCH)" 97.5,230.25 r180 top
C700 "100nF/25V/0603" "CAP 0603 (0201_INCH)" 118.75,214 r180 top
C701 "10uF/25V/1608" "CAP 1608 (0603_INCH)" 103.25,204 r180 top
C702 "100nF/16V/1005" "CAP 1005 (0402_INCH)" 107.75,203.75 r180 top
C703 "100nF/25V/0603" "CAP 0603 (0201_INCH)" 111.25,180 r180 top
C704 "10uF/10V/1608" "CAP 1608 (0603_INCH)" 93.75,175.5 r180 top
C705 "100nF/16V/1005" "CAP 1005 (0402_INCH)" 97.5,175.5 r180 top
C706 "100nF/16V/1005" "CAP 1005 (0402_INCH)" 101,175.5 r180 top
C707 "100nF/16V/1005" "CAP 1005 (0402_INCH)" 103.75,175.75 r180 top
C708 "100nF/16V/1005" "CAP 1005 (0402_INCH)" 106.75,176 r180 top
C709 "2.2uF/16V/1608" "CAP 1608 (0603_INCH)" 98.5,180 r180 top
C710 "10uF/10V/1608" "CAP 1608 (0603_INCH)" 110.5,176 r180 top
C711 "100nF/16V/1005" "CAP 1005 (0402_INCH)" 113.75,176 r180 top
C712 "100nF/16V/1005" "CAP 1005 (0402_INCH)" 116.75,176.25 r180 top
C713 "100nF/16V/1005" "CAP 1005 (0402_INCH)" 120.5,176.25 r180 top
C714 "100nF/16V/1005" "CAP 1005 (0402_INCH)" 124,176.5 r180 top
C800 "10uF/25V/1608" "CAP 1608 (0603_INCH)" 107.5,154.5 r180 top
C801 "100nF/16V/1005" "CAP 1005 (0402_INCH)" 110.75,154.75 r180 top
C802 "100nF/16V/1005" "CAP 1005 (0402_INCH)" 114.5,154.75 r180 top
C803 "1uF/50V/1608" "CAP 1608 (0603_INCH)" 118.5,154.75 r180 top
C804 "470pF/50V/1608" "CAP 1608 (0603_INCH)" 122.5,154.5 r180 top
C805 "18pF/50V/1608" "CAP 1608 (0603_INCH)" 133.5,157 r90 top
C806 "18pF/50V/1608" "CAP 1608 (0603_INCH)" 136.25,157.25 r90 top
C807 "4.7uF/16V/1608" "CAP 1608 (0603_INCH)" 29.5,38.75 r180 bottom
C808 "100nF/16V/1005" "CAP 1005 (0402_INCH)" 26.5,42.01 r270 bottom
C809 "10pF/50V/1608" "CAP 1608 (0603_INCH)" 51,24.75 r180 top
C810 "10pF/50V/1608" "CAP 1608 (0603_INCH)" 55,24.75 r180 top
C811 "10pF/50V/1608" "CAP 1608 (0603_INCH)" 59.75,24.75 r180 top
C812 "10pF/50V/1608" "CAP 1608 (0603_INCH)" 64.25,24.75 r180 top
C813 "10nF/50V/1608" "CAP 1608 (0603_INCH)" 9,55.25 r180 bottom
C814 "10nF/50V/1608" "CAP 1608 (0603_INCH)" 9,53.5 r180 bottom
C900 "100nF/25V/0603" "CAP 0603 (0201_INCH)" 129.25,131 r180 top
C901 "100nF/16V/1005" "CAP 1005 (0402_INCH)" 96.75,112.25 r180 top
C902 "4.7uF/10V/1005" "CAP 1005 (0402_INCH)" 120.25,112.75 r180 top
C903 "100nF/25V/0603" "CAP 0603 (0201_INCH)" 97.5,105.25 r180 top
C904 "4.7uF/10V/1005" "CAP 1005 (0402_INCH)" 94.25,101.5 r180 top
C905 "1uF/25V/1005" "CAP 1005 (0402_INCH)" 97.75,101.75 r180 top
C906 "100nF/25V/0603" "CAP 0603 (0201_INCH)" 101.75,102 r180 top
C907 "100nF/25V/0603" "CAP 0603 (0201_INCH)" 141,112 r90 top
CN300 "DC_Jack" CON_DC-JACK 14.8,66.9 r90 top locked
CN500 "UX60SC-MB-5ST(80)" "CON_USB2.0-Mini-B (UX60SC-MB-5ST(80))" 91,79.5 r180 top locked
CN700 "TF-01A" CON_MICRO-SD_Socket_TF-01A 110.022,62.05 r270 bottom
CN800 "HR911105A" CON_RJ45 11.22,55.165 r90 top locked
CN900 "MC-311S" "CON USB-Type-C (16P)" 104.25,80.15 r180 top locked
CN901 "0878321420/NC" "CON_NC_BOX_HEADER_DUAL_2x7PIN(2.00MM) (0878321420)" 25.75,7.5 r180 bottom
CN1000 "10144517-101802LF" CON_BergStak-Lite(0.8mm)_MALE-100P(10144517-101802LF)_HandSolder 65,8 r180 bottom locked
CN1001 "10144517-101802LF" CON_BergStak-Lite(0.8mm)_MALE-100P(10144517-101802LF)_HandSolder 55,77 r180 bottom
CN1002 "PH_4P" "CON PIN_HEADER-4PIN(2.54MM)" 178.5,196.75 r180 top
D300 "B5819W" DIO_SOD-123 20.25,75.75 r0 bottom
D301 "B5819W" DIO_SOD-123 20.25,79 r0 bottom
FB400 "BLM21PG121SN1D" "FB 2012 (0805_inch)" 23.75,214 r180 top
FB401 "BLM21PG121SN1D" "FB 2012 (0805_inch)" 5.25,207.5 r180 top
FB402 "BLM21PG121SN1D" "FB 2012 (0805_inch)" 9.75,207.5 r180 top
FB800 "BLM21PG121SN1D" "FB 2012 (0805_inch)" 103,154.5 r180 top
H1000 "NTH-3MM" "HOLE NTH-3MM" 5,5 r0 top locked
H1001 "NTH-3MM" "HOLE NTH-3MM" 115,5 r0 top locked
H1002 "NTH-3MM" "HOLE NTH-3MM" 5,80 r0 top locked
H1003 "NTH-3MM" "HOLE NTH-3MM" 115,80 r0 top locked
L300 "LQM2HPN2R2MG0L" IND_LQM2HPN2R2MG0L 34.5,59.25 r90 top
L301 "LQM2HPN2R2MG0L" IND_LQM2HPN2R2MG0L 34.5,54.66 r270 top
L302 "LQM2HPN2R2MG0L" IND_LQM2HPN2R2MG0L 39.66,51.75 r180 top
LED300 "GREEN/2012" "LED MHT170RGBCT (GREEN)" 11.25,82.25 r0 top
LED301 "GREEN/2012" "LED MHT170RGBCT (GREEN)" 10.9,41.25 r180 top
LED302 "GREEN/2012" "LED MHT170RGBCT (GREEN)" 10.9,44.5 r180 top
LED303 "GREEN/2012" "LED MHT170RGBCT (GREEN)" 11.25,79.25 r0 top
LED500 "GREEN/2012" "LED MHT170RGBCT (GREEN)" 100,245.3 r180 top
LED501 "BLUE/2012" "LED MHT170RGBCT (BLUE)" 127.125,46.25 r0 top
LED502 "BLUE/2012" "LED MHT170RGBCT (BLUE)" 127.125,44 r0 top
LED503 "BLUE/2012" "LED MHT170RGBCT (BLUE)" 127.125,41.75 r0 top
LED504 "BLUE/2012" "LED MHT170RGBCT (BLUE)" 127.125,39.5 r0 top
LED800 "RGB/2012" "LED MHT170RGBCT" 127.125,48.5 r0 top
LED900 "GREEN/2012" "LED MHT170RGBCT (GREEN)" 110.25,112.75 r180 top
LED901 "BLUE/2012" "LED MHT170RGBCT (BLUE)" 110,105.5 r180 top
LED902 "BLUE/2012" "LED MHT170RGBCT (BLUE)" 115.75,105.5 r180 top
Q500 "2N7002" "SOT 23-3 (DIODES INCORPORATED)" 115.25,49.5 r90 bottom
Q501 "2N7002" "SOT 23-3 (DIODES INCORPORATED)" 115.25,44 r90 bottom
Q502 "2N7002" "SOT 23-3 (DIODES INCORPORATED)" 115.25,38.5 r90 bottom
Q503 "2N7002" "SOT 23-3 (DIODES INCORPORATED)" 115.25,33 r90 bottom
Q800 "2N7002" "SOT 23-3 (DIODES INCORPORATED)" 106.75,49.5 r90 bottom
Q801 "2N7002" "SOT 23-3 (DIODES INCORPORATED)" 106.75,44 r90 bottom
Q802 "2N7002" "SOT 23-3 (DIODES INCORPORATED)" 106.75,38.5 r90 bottom
R300 "0R/3216" "RES 3216 (1206_inch)" 18,71.75 r270 top
R301 "100K/1608" "RES 1608 (0603_inch)" 15.35,81 r0 bottom value=100K
R302 "10K/1608/NC" "RES 1608 (0603_inch)/NC" 8.5,32.75 r180 bottom value=10K
R303 "10K/1608/NC" "RES 1608 (0603_inch)/NC" 8.5,35.25 r180 bottom value=10K
R304 "100K/1608" "RES 1608 (0603_inch)" 25,79 r180 bottom value=100K
R305 "100K/1608" "RES 1608 (0603_inch)" 15.35,78.5 r0 bottom value=100K
R306 "680R/2012" "RES 2012 (0805_inch)" 11.375,82.25 r180 bottom value=680R
R307 "4.7K/1608" "RES 1608 (0603_inch)" 41.25,65.4 r90 top value=4.7K
R308 "0R/1005" "RES 1005 (0402_inch)" 41.25,63.25 r0 top value=0R
R309 "0R/3216" "RES 3216 (1206_inch)" 10.1,75.75 r0 bottom
R310 "0R/2012" "RES 2012 (0805_inch)" 32,59.25 r270 top value=0R
R311 "0R/2012" "RES 2012 (0805_inch)" 32,54.445 r90 top value=0R
R312 "0R/2012" "RES 2012 (0805_inch)" 39.445,49.25 r0 top value=0R
R313 "0R/2012" "RES 2012 (0805_inch)" 46.5,64.5 r0 top value=0R
R314 "0R/2012" "RES 2012 (0805_inch)" 46.5,65 r0 bottom value=0R
R315 "0R/2012" "RES 2012 (0805_inch)" 46.5,66.6 r0 top value=0R
R316 "0R/2012" "RES 2012 (0805_inch)" 46.5,62 r0 top value=0R
R317 "0R/2012" "RES 2012 (0805_inch)" 47.75,55 r270 top value=0R
R318 "510R/1608" "RES 1608 (0603_inch)" 10.75,41.25 r180 bottom value=510R
R319 "0R/2012" "RES 2012 (0805_inch)" 48.25,58.5 r0 top value=0R
R320 "1.5K/2012" "RES 2012 (0805_inch)" 35.25,49.25 r180 top value=1.5K
R321 "1.5K/2012" "RES 2012 (0805_inch)" 35.25,51.5 r180 top value=1.5K
R322 "0R/1608" "RES 1608 (0603_inch)" 33,142.5 r180 top value=0R
R323 "0R/1608" "RES 1608 (0603_inch)" 33,139.5 r180 top value=0R
R324 "0R/1608" "RES 1608 (0603_inch)" 33,136.25 r180 top value=0R
R325 "0R/1608" "RES 1608 (0603_inch)" 36.75,142.25 r180 top value=0R
R326 "200K/1608" "RES 1608 (0603_inch)" 25.1,91.05 r90 bottom value=200K
R327 "4.7K/1608" "RES 1608 (0603_inch)" 32,131.75 r180 top value=4.7K
R328 "4.7K/1608" "RES 1608 (0603_inch)" 35.75,131.75 r180 top value=4.7K
R329 "0R/1608" "RES 1608 (0603_inch)" 36.75,139.25 r180 top value=0R
R330 "0R/1608" "RES 1608 (0603_inch)" 36.75,136.5 r180 top value=0R
R331 "510R/1608" "RES 1608 (0603_inch)" 10.75,44.5 r180 bottom value=510R
R332 "0R/1608" "RES 1608 (0603_inch)" 40,142.5 r180 top value=0R
R333 "330K/1608" "RES 1608 (0603_inch)" 24.6,88.55 r180 bottom value=330K
R334 "510R/1608" "RES 1608 (0603_inch)" 11,79.25 r180 bottom value=510R
R335 "0R/1608" "RES 1608 (0603_inch)" 25.1,93.95 r270 bottom value=0R
R336 "0R/2012" "RES 2012 (0805_inch)" 20.375,42 r0 bottom value=0R
R337 "0R/2012/NC" "RES 2012 (0805_INCH)/NC" 20.375,38.75 r0 bottom value=0R
R400 "0R/2012" "RES 2012 (0805_inch)" 15,214 r180 top value=0R
R401 "0R/2012" "RES 2012 (0805_inch)" 19.25,214 r180 top value=0R
R402 "0R/1608/NC" "RES 1608 (0603_inch)/NC" 4.25,214.5 r180 top value=0R
R500 "0R/3216" "RES 3216 (1206_inch)" 126,7.25 r180 top
R501 "1M/1005" "RES 1005 (0402_inch)" 93.25,242.05 r180 top value=1M
R502 "100K/1608/NC" "RES 1608 (0603_inch)/NC" 91,25.25 r90 bottom value=100K
R503 "100K/1608" "RES 1608 (0603_inch)" 92.75,25.25 r90 bottom value=100K
R504 "100K/1608/NC" "RES 1608 (0603_inch)/NC" 94.5,25.25 r90 bottom value=100K
R505 "100K/1608/NC" "RES 1608 (0603_inch)/NC" 96.25,25.25 r90 bottom value=100K
R506 "100K/1608/NC" "RES 1608 (0603_inch)/NC" 98,25.25 r90 bottom value=100K
R507 "100K/1608/NC" "RES 1608 (0603_inch)/NC" 99.75,25.25 r90 bottom value=100K
R508 "100K/1608/NC" "RES 1608 (0603_inch)/NC" 101.5,25.25 r90 bottom value=100K
R509 "100K/1608/NC" "RES 1608 (0603_inch)/NC" 103.25,25.25 r90 bottom value=100K
R510 "100K/1608/NC" "RES 1608 (0603_inch)/NC" 105,25.25 r90 bottom value=100K
R511 "100K/1608/NC" "RES 1608 (0603_inch)/NC" 106.75,25.25 r90 bottom value=100K
R512 "100K/1608" "RES 1608 (0603_inch)" 108.5,25.25 r90 bottom value=100K
R513 "100K/1608" "RES 1608 (0603_inch)" 110.25,25.25 r90 bottom value=100K
R514 "100K/1608" "RES 1608 (0603_inch)" 112,25.25 r90 bottom value=100K
R515 "100K/1608" "RES 1608 (0603_inch)" 113.75,25.25 r90 bottom value=100K
R516 "100K/1608/NC" "RES 1608 (0603_inch)/NC" 115.5,25.25 r90 bottom value=100K
R517 "100K/1608/NC" "RES 1608 (0603_inch)/NC" 117.25,25.25 r90 bottom value=100K
R518 "100R/1608" "RES 1608 (0603_inch)" 8.4,14.75 r0 bottom value=100R
R519 "4.7K/1005" "RES 1005 (0402_inch)" 131.25,7.25 r180 top value=4.7K
R520 "4.7K/1005" "RES 1005 (0402_inch)" 134.25,7.25 r180 top value=4.7K
R521 "1K/1608" "RES 1608 (0603_inch)" 104.75,245.55 r90 top value=1K
R522 "0R/1608" "RES 1608 (0603_inch)" 138.5,7 r180 top value=0R
R523 "100K/1608" "RES 1608 (0603_inch)" 91,10.5 r90 bottom value=100K
R524 "100K/1608/NC" "RES 1608 (0603_inch)/NC" 92.75,10.5 r90 bottom value=100K
R525 "100K/1608" "RES 1608 (0603_inch)" 94.5,10.5 r90 bottom value=100K
R526 "100K/1608" "RES 1608 (0603_inch)" 96.25,10.5 r90 bottom value=100K
R527 "100K/1608" "RES 1608 (0603_inch)" 98,10.5 r90 bottom value=100K
R528 "100K/1608" "RES 1608 (0603_inch)" 99.75,10.5 r90 bottom value=100K
R529 "100K/1608" "RES 1608 (0603_inch)" 101.5,10.5 r90 bottom value=100K
R530 "100K/1608" "RES 1608 (0603_inch)" 103.25,10.5 r90 bottom value=100K
R531 "100K/1608" "RES 1608 (0603_inch)" 105,10.5 r90 bottom value=100K
R532 "100K/1608" "RES 1608 (0603_inch)" 106.75,10.5 r90 bottom value=100K
R533 "100K/1608/NC" "RES 1608 (0603_inch)/NC" 108.5,10.5 r90 bottom value=100K
R534 "100K/1608/NC" "RES 1608 (0603_inch)/NC" 110.25,10.5 r90 bottom value=100K
R535 "100K/1608/NC" "RES 1608 (0603_inch)/NC" 112,10.5 r90 bottom value=100K
R536 "100K/1608/NC" "RES 1608 (0603_inch)/NC" 113.75,10.5 r90 bottom value=100K
R537 "100K/1608" "RES 1608 (0603_inch)" 115.5,10.5 r90 bottom value=100K
R538 "100K/1608" "RES 1608 (0603_inch)" 117.25,10.5 r90 bottom value=100K
R539 "10K/1608" "RES 1608 (0603_inch)" 110.5,247.8 r180 top value=10K
R540 "0R/1005" "RES 1005 (0402_inch)" 64,52.69 r270 top value=0R
R541 "470R/1608" "RES 1608 (0603_inch)" 112.75,49.15 r270 bottom value=470R
R542 "0R/1608" "RES 1608 (0603_inch)" 110.5,245.05 r180 top value=0R
R543 "0R/1608" "RES 1608 (0603_inch)" 58.8,52.9 r270 top value=0R
R544 "12K/1608" "RES 1608 (0603_inch)" 115.25,47 r0 bottom value=12K
R545 "0R/1608" "RES 1608 (0603_inch)" 110.25,242.3 r180 top value=0R
R546 "22R/1608" "RES 1608 (0603_inch)" 117.75,49.15 r270 bottom value=22R
R547 "470R/1608" "RES 1608 (0603_inch)" 112.75,43.65 r270 bottom value=470R
R548 "12K/1608" "RES 1608 (0603_inch)" 115.25,41.5 r0 bottom value=12K
R549 "22R/1608" "RES 1608 (0603_inch)" 117.75,43.65 r270 bottom value=22R
R550 "470R/1608" "RES 1608 (0603_inch)" 112.75,38.15 r270 bottom value=470R
R551 "0R/1005" "RES 1005 (0402_inch)" 68,26.8 r90 top value=0R
R552 "12K/1608" "RES 1608 (0603_inch)" 115.25,36 r0 bottom value=12K
R553 "0R/1608" "RES 1608 (0603_inch)" 73.3,26.3 r90 top value=0R
R554 "22R/1608" "RES 1608 (0603_inch)" 117.75,38.15 r270 bottom value=22R
R555 "470R/1608" "RES 1608 (0603_inch)" 112.75,32.65 r270 bottom value=470R
R556 "12K/1608" "RES 1608 (0603_inch)" 117.75,32.65 r270 bottom value=12K
R557 "22R/1608" "RES 1608 (0603_inch)" 115.25,30.5 r0 bottom value=22R
R600 "1.5K/1005" "RES 1005 (0402_inch)" 91.75,226.5 r180 top value=1.5K
R601 "10K/1005" "RES 1005 (0402_inch)" 94.75,226.5 r180 top value=10K
R602 "10K/1005" "RES 1005 (0402_inch)" 98.5,226.5 r180 top value=10K
R603 "10K/1005" "RES 1005 (0402_inch)" 102.5,226.5 r180 top value=10K
R604 "240R/1608" "RES 1608 (0603_inch)" 102.5,223.1 r90 top value=240R
R605 "49.9R/1005" "RES 1005 (0402_inch)" 91.75,230.25 r180 top value=49.9R
R700 "4.7K/1608/NC" "RES 1608 (0603_inch)/NC" 107.5,214 r180 top value=4.7K
R701 "4.7K/1608/NC" "RES 1608 (0603_inch)/NC" 112,214.25 r180 top value=4.7K
R702 "4.7K/1005" "RES 1005 (0402_inch)" 115.75,214.25 r180 top value=4.7K
R703 "10K/1005" "RES 1005 (0402_inch)" 93.25,204 r180 top value=10K
R704 "10K/1005" "RES 1005 (0402_inch)" 92,208.25 r180 top value=10K
R705 "10K/1005" "RES 1005 (0402_inch)" 95.25,208.25 r180 top value=10K
R706 "10K/1005" "RES 1005 (0402_inch)" 98.5,208.25 r180 top value=10K
R707 "10K/1005" "RES 1005 (0402_inch)" 102,208.25 r180 top value=10K
R708 "10K/1005" "RES 1005 (0402_inch)" 105.5,208.25 r180 top value=10K
R709 "10K/1005" "RES 1005 (0402_inch)" 109,208.25 r180 top value=10K
R710 "22R/1005" "RES 1005 (0402_inch)" 112.75,208.25 r180 top value=22R
R711 "0R/1608" "RES 1608 (0603_inch)" 98.25,204 r180 top value=0R
R712 "22R/1005" "RES 1005 (0402_inch)" 116.75,208 r180 top value=22R
R713 "22R/1005" "RES 1005 (0402_inch)" 120.25,208.25 r180 top value=22R
R714 "22R/1005" "RES 1005 (0402_inch)" 123.75,208.25 r180 top value=22R
R715 "22R/1005" "RES 1005 (0402_inch)" 127.25,208.25 r180 top value=22R
R716 "22R/1005" "RES 1005 (0402_inch)" 131,208.25 r180 top value=22R
R717 "0R/1608" "RES 1608 (0603_inch)" 107.75,180 r180 top value=0R
R718 "22R/1005" "RES 1005 (0402_inch)" 104,191 r180 top value=22R
R719 "10K/1005" "RES 1005 (0402_inch)" 93.75,191 r180 top value=10K
R720 "10K/1005" "RES 1005 (0402_inch)" 96.75,191 r180 top value=10K
R721 "10K/1005" "RES 1005 (0402_inch)" 100,191 r180 top value=10K
R722 "0R/1608" "RES 1608 (0603_inch)" 92.25,214 r180 top value=0R
R723 "0R/1005" "RES 1005 (0402_inch)" 107,191 r180 top value=0R
R724 "10K/1005" "RES 1005 (0402_inch)" 93.5,187 r180 top value=10K
R725 "10K/1005" "RES 1005 (0402_inch)" 96.5,187 r180 top value=10K
R726 "10K/1005" "RES 1005 (0402_inch)" 99.75,187 r180 top value=10K
R727 "10K/1005" "RES 1005 (0402_inch)" 103.25,187 r180 top value=10K
R728 "10K/1005" "RES 1005 (0402_inch)" 106.75,187.25 r180 top value=10K
R729 "10K/1005" "RES 1005 (0402_inch)" 110.25,187.25 r180 top value=10K
R730 "10K/1005" "RES 1005 (0402_inch)" 113.5,187.25 r180 top value=10K
R731 "10K/1005" "RES 1005 (0402_inch)" 116.75,187.25 r180 top value=10K
R732 "22R/1005" "RES 1005 (0402_inch)" 110,191 r180 top value=22R
R733 "22R/1005" "RES 1005 (0402_inch)" 93.5,183.75 r180 top value=22R
R734 "22R/1005" "RES 1005 (0402_inch)" 96.75,183.75 r180 top value=22R
R735 "22R/1005" "RES 1005 (0402_inch)" 99.75,183.75 r180 top value=22R
R736 "22R/1005" "RES 1005 (0402_inch)" 103.25,183.75 r180 top value=22R
R737 "22R/1005" "RES 1005 (0402_inch)" 106.5,183.75 r180 top value=22R
R738 "22R/1005" "RES 1005 (0402_inch)" 110,183.75 r180 top value=22R
R739 "22R/1005" "RES 1005 (0402_inch)" 113.25,183.5 r180 top value=22R
R740 "22R/1005" "RES 1005 (0402_inch)" 117,184 r180 top value=22R
R741 "0R/2012" "RES 2012 (0805_inch)" 94.25,180.25 r180 top value=0R
R800 "100R/1005" "RES 1005 (0402_inch)" 93.75,166 r180 top value=100R
R801 "22R/1005" "RES 1005 (0402_inch)" 96.75,166 r180 top value=22R
R802 "22R/1005" "RES 1005 (0402_inch)" 100,166.25 r180 top value=22R
R803 "22R/1005" "RES 1005 (0402_inch)" 103.25,166.25 r180 top value=22R
R804 "22R/1005" "RES 1005 (0402_inch)" 106.5,166 r180 top value=22R
R805 "22R/1005" "RES 1005 (0402_inch)" 109.75,166 r180 top value=22R
R806 "100R/1005" "RES 1005 (0402_inch)" 113,166.25 r180 top value=100R
R807 "100R/1005" "RES 1005 (0402_inch)" 116,166.5 r180 top value=100R
R808 "100R/1005" "RES 1005 (0402_inch)" 118.75,166.5 r180 top value=100R
R809 "100R/1005" "RES 1005 (0402_inch)" 93.5,162 r180 top value=100R
R810 "100R/1005" "RES 1005 (0402_inch)" 96.25,162 r180 top value=100R
R811 "100R/1005" "RES 1005 (0402_inch)" 99,162.25 r180 top value=100R
R812 "100R/1005" "RES 1005 (0402_inch)" 101.75,161.75 r180 top value=100R
R813 "0R/1608/NC" "RES 1608 (0603_inch)/NC" 105.5,162.25 r180 top value=0R
R814 "100R/1005" "RES 1005 (0402_inch)" 108.5,162.25 r180 top value=100R
R815 "0R/1608/NC" "RES 1608 (0603_inch)/NC" 112.5,162 r180 top value=0R
R816 "100R/1005" "RES 1005 (0402_inch)" 116,162 r180 top value=100R
R817 "0R/1005" "RES 1005 (0402_inch)" 119,162 r180 top value=0R
R818 "0R/1005" "RES 1005 (0402_inch)" 121.75,162.25 r180 top value=0R
R819 "10K/1608" "RES 1608 (0603_inch)" 124.75,162.25 r180 top value=10K
R820 "0R/1608" "RES 1608 (0603_inch)" 128.75,162.25 r180 top value=0R
R821 "0R/1608" "RES 1608 (0603_inch)" 94,158.25 r180 top value=0R
R822 "12K/1608" "RES 1608 (0603_inch)" 97.75,158.25 r180 top value=12K
R823 "100R/1608" "RES 1608 (0603_inch)" 101.5,158.25 r180 top value=100R
R824 "10K/1608" "RES 1608 (0603_inch)" 105.5,158.25 r180 top value=10K
R825 "1.5K/1608" "RES 1608 (0603_inch)" 109.5,158.25 r180 top value=1.5K
R826 "1.5K/1608" "RES 1608 (0603_inch)" 113,158.25 r180 top value=1.5K
R827 "1.5K/1608" "RES 1608 (0603_inch)" 116.75,158.5 r180 top value=1.5K
R828 "1.5K/1608" "RES 1608 (0603_inch)" 120.75,158.5 r180 top value=1.5K
R829 "10K/1608" "RES 1608 (0603_inch)" 125,158.5 r180 top value=10K
R830 "10K/1608" "RES 1608 (0603_inch)" 128.5,158.5 r180 top value=10K
R831 "10K/1608" "RES 1608 (0603_inch)" 94.25,154.25 r180 top value=10K
R832 "10K/1608" "RES 1608 (0603_inch)" 98.25,154.25 r180 top value=10K
R833 "10K/1608" "RES 1608 (0603_inch)" 26.5,39.32 r270 bottom value=10K
R834 "0R/2012" "RES 2012 (0805_inch)" 12.75,53.5 r0 bottom value=0R
R835 "10K/1608" "RES 1608 (0603_inch)" 29.5,44.5 r0 bottom value=10K
R836 "49.9R/1005" "RES 1005 (0402_inch)" 41.81,25.75 r180 top value=49.9R
R837 "49.9R/1005" "RES 1005 (0402_inch)" 41,28.5 r180 top value=49.9R
R838 "49.9R/1005" "RES 1005 (0402_inch)" 43.75,28.5 r180 top value=49.9R
R839 "49.9R/1005" "RES 1005 (0402_inch)" 46.5,28.5 r180 top value=49.9R
R840 "0R/2012" "RES 2012 (0805_inch)" 25.75,57.5 r90 bottom locked value=0R
R841 "0R/2012" "RES 2012 (0805_inch)" 23.5,57.5 r90 bottom locked value=0R
R842 "0R/2012" "RES 2012 (0805_inch)" 23.5,49 r90 top value=0R
R843 "0R/2012" "RES 2012 (0805_inch)" 25.75,49 r90 top value=0R
R844 "0R/2012" "RES 2012 (0805_inch)" 12.75,56.5 r180 bottom value=0R
R845 "470R/1608" "RES 1608 (0603_inch)" 2.75,59.25 r0 bottom value=470R
R846 "470R/1608" "RES 1608 (0603_inch)" 2.75,51.08 r0 bottom value=470R
R847 "470R/1608" "RES 1608 (0603_inch)" 104.25,49.15 r270 bottom value=470R
R848 "12K/1608" "RES 1608 (0603_inch)" 106.75,47 r0 bottom value=12K
R849 "22R/1608" "RES 1608 (0603_inch)" 109.25,49.15 r270 bottom value=22R
R850 "470R/1608" "RES 1608 (0603_inch)" 104.25,43.65 r270 bottom value=470R
R851 "12K/1608" "RES 1608 (0603_inch)" 106.75,41.5 r0 bottom value=12K
R852 "22R/1608" "RES 1608 (0603_inch)" 109.25,43.65 r270 bottom value=22R
R853 "470R/1608" "RES 1608 (0603_inch)" 104.25,38.15 r90 bottom value=470R
R854 "12K/1608" "RES 1608 (0603_inch)" 106.75,36 r0 bottom value=12K
R855 "22R/1608" "RES 1608 (0603_inch)" 109.25,38.15 r270 bottom value=22R
R900 "0R/2012" "RES 2012 (0805_inch)" 98.5,131.5 r180 top value=0R
R901 "0R/2012/NC" "RES 2012 (0805_INCH)/NC" 118.75,131.5 r180 top value=0R
R902 "0R/2012/NC" "RES 2012 (0805_INCH)/NC" 103.25,131.5 r180 top value=0R
R903 "0R/2012" "RES 2012 (0805_inch)" 124.5,131.25 r180 top value=0R
R904 "100K/1005" "RES 1005 (0402_inch)" 108,131.75 r180 top value=100K
R905 "5.1K/1005" "RES 1005 (0402_inch)" 101.5,112.25 r180 top value=5.1K
R906 "5.1K/1005" "RES 1005 (0402_inch)" 104.75,112.5 r180 top value=5.1K
R907 "1M/1005" "RES 1005 (0402_inch)" 93.75,112.25 r180 top value=1M
R908 "1K/1608" "RES 1608 (0603_inch)" 116.25,112.5 r180 top value=1K
R909 "10K/1608" "RES 1608 (0603_inch)" 102,122.75 r180 top value=10K
R910 "4.7K/1005" "RES 1005 (0402_inch)" 94.25,105.25 r180 top value=4.7K
R911 "0R/1608" "RES 1608 (0603_inch)" 107,122.75 r180 top value=0R
R912 "680R/1608" "RES 1608 (0603_inch)" 120,105.5 r180 top value=680R
R913 "680R/1608" "RES 1608 (0603_inch)" 123.75,105.5 r180 top value=680R
R914 "0R/2012" "RES 2012 (0805_inch)" 101.25,105.5 r180 top value=0R
R915 "0R/2012" "RES 2012 (0805_inch)" 105.25,105.5 r180 top value=0R
R916 "0R/1608" "RES 1608 (0603_inch)" 93.75,131.5 r180 top value=0R
R1000 "0R/1005" "RES 1005 (0402_inch)" 44.3,13.75 r270 bottom value=0R
R1001 "0R/1005" "RES 1005 (0402_inch)" 45.4,2.25 r270 bottom value=0R
R1002 "0R/1005" "RES 1005 (0402_inch)" 47,13.75 r270 bottom value=0R
R1003 "0R/1005" "RES 1005 (0402_inch)" 47,2.25 r270 bottom value=0R
R1004 "0R/1005" "RES 1005 (0402_inch)" 48.6,13.75 r270 bottom value=0R
R1005 "0R/1005" "RES 1005 (0402_inch)" 48.6,2.25 r270 bottom value=0R
R1006 "0R/1005" "RES 1005 (0402_inch)" 50.2,13.75 r270 bottom value=0R
R1007 "0R/1005" "RES 1005 (0402_inch)" 50.2,2.25 r270 bottom value=0R
R1008 "0R/1005" "RES 1005 (0402_inch)" 51.8,13.75 r270 bottom value=0R
R1009 "0R/1005" "RES 1005 (0402_inch)" 51.8,2.25 r270 bottom value=0R
R1010 "0R/1005" "RES 1005 (0402_inch)" 53.4,13.75 r270 bottom value=0R
R1011 "0R/1005" "RES 1005 (0402_inch)" 53.4,2.25 r270 bottom value=0R
R1012 "0R/1005" "RES 1005 (0402_inch)" 55,13.75 r270 bottom value=0R
R1013 "0R/1005" "RES 1005 (0402_inch)" 55,2.25 r270 bottom value=0R
R1014 "0R/1005" "RES 1005 (0402_inch)" 56.6,13.75 r270 bottom value=0R
R1015 "0R/1005" "RES 1005 (0402_inch)" 56.6,2.25 r270 bottom value=0R
R1016 "0R/1005" "RES 1005 (0402_inch)" 58.2,13.75 r270 bottom value=0R
R1017 "0R/1005" "RES 1005 (0402_inch)" 58.2,2.25 r270 bottom value=0R
R1018 "0R/1005" "RES 1005 (0402_inch)" 59.8,13.75 r270 bottom value=0R
R1019 "0R/1005" "RES 1005 (0402_inch)" 59.8,2.25 r270 bottom value=0R
R1020 "0R/1005" "RES 1005 (0402_inch)" 61.4,13.75 r270 bottom value=0R
R1021 "0R/1005" "RES 1005 (0402_inch)" 61.4,2.25 r270 bottom value=0R
R1022 "0R/1005" "RES 1005 (0402_inch)" 63,13.75 r270 bottom value=0R
R1023 "0R/1005" "RES 1005 (0402_inch)" 64.6,13.75 r270 bottom value=0R
R1024 "0R/1005" "RES 1005 (0402_inch)" 66.2,13.75 r270 bottom value=0R
R1025 "0R/1005" "RES 1005 (0402_inch)" 67.8,13.75 r270 bottom value=0R
R1026 "0R/1005" "RES 1005 (0402_inch)" 69.4,13.75 r270 bottom value=0R
R1027 "0R/1005" "RES 1005 (0402_inch)" 53,82.75 r270 bottom value=0R
R1028 "0R/1005" "RES 1005 (0402_inch)" 53,71.25 r270 bottom value=0R
R1029 "0R/1005" "RES 1005 (0402_inch)" 71,13.75 r270 bottom value=0R
R1030 "0R/1005" "RES 1005 (0402_inch)" 54.6,82.75 r270 bottom value=0R
R1031 "0R/1005" "RES 1005 (0402_inch)" 54.6,71.25 r270 bottom value=0R
R1032 "0R/1005" "RES 1005 (0402_inch)" 72.6,13.75 r270 bottom value=0R
R1033 "0R/1005" "RES 1005 (0402_inch)" 56.2,82.75 r270 bottom value=0R
R1034 "0R/1005" "RES 1005 (0402_inch)" 56.2,71.25 r270 bottom value=0R
R1035 "0R/1005" "RES 1005 (0402_inch)" 74.2,13.75 r270 bottom value=0R
R1036 "0R/1005" "RES 1005 (0402_inch)" 57.8,82.75 r270 bottom value=0R
R1037 "0R/1005" "RES 1005 (0402_inch)" 57.8,71.25 r270 bottom value=0R
R1038 "0R/1005" "RES 1005 (0402_inch)" 75.8,13.75 r270 bottom value=0R
R1039 "0R/1005" "RES 1005 (0402_inch)" 59.4,82.75 r270 bottom value=0R
R1040 "0R/1005" "RES 1005 (0402_inch)" 59.4,71.25 r270 bottom value=0R
R1041 "0R/1005" "RES 1005 (0402_inch)" 77.4,13.75 r270 bottom value=0R
R1042 "0R/1005" "RES 1005 (0402_inch)" 61,82.75 r270 bottom value=0R
R1043 "0R/1005" "RES 1005 (0402_inch)" 61,71.25 r270 bottom value=0R
R1044 "0R/1005" "RES 1005 (0402_inch)" 79,13.75 r270 bottom value=0R
R1045 "0R/1005" "RES 1005 (0402_inch)" 62.6,82.75 r270 bottom value=0R
R1046 "0R/1005" "RES 1005 (0402_inch)" 62.6,71.25 r270 bottom value=0R
R1047 "0R/1005" "RES 1005 (0402_inch)" 80.6,13.75 r270 bottom value=0R
R1048 "0R/1005" "RES 1005 (0402_inch)" 64.2,82.75 r270 bottom value=0R
R1049 "0R/1005" "RES 1005 (0402_inch)" 64.2,71.25 r270 bottom value=0R
R1050 "0R/1005" "RES 1005 (0402_inch)" 82.2,13.75 r270 bottom value=0R
R1051 "0R/1005" "RES 1005 (0402_inch)" 65.8,71.25 r270 bottom value=0R
R1052 "0R/1005" "RES 1005 (0402_inch)" 83.8,13.75 r270 bottom value=0R
R1053 "0R/1005" "RES 1005 (0402_inch)" 67.4,71.25 r270 bottom value=0R
R1054 "0R/1005" "RES 1005 (0402_inch)" 69,71.25 r270 bottom value=0R
R1055 "0R/1005" "RES 1005 (0402_inch)" 70.6,71.25 r270 bottom value=0R
SW300 "K2-1102SP-C4SC-04" "SW K2-1102SP-C4SC-04" 7,35 r180 top
SW301 "K2-1102SP-C4SC-04" "SW K2-1102SP-C4SC-04" 24.75,81 r180 top
SW500 "K2-1102SP-C4SC-04" "SW K2-1102SP-C4SC-04" 7,17 r180 top
SW900 "K2-1102SP-C4SC-04" "SW K2-1102SP-C4SC-04" 7,26.25 r180 top
TP400 "TP_CIRCLE" "TP Circle" 8.5,214.25 r180 top
U300 "TPS65217CRSLR" IC_VQFN-48(6x6) 41.425,58.5 r270 top
U301 "AMS1117-3.3" "SOT 223-3 (DIODES INCORPORATED)" 7.35,91.3 r0 bottom
U302 "MIC5209YM-TR" "IC_SOIC-8 (4.90x3.90mm)" 20.1,92.3 r180 bottom
U400 "AM3358BZCZ100" IC_SOC_AM3358BZCZ100 64,43 r180 top locked
U501 "TPD4S012DRYR" IC_SON-6 95.25,245.8 r90 top
U601 "D2516ECMDXGJD-U" "IC_MEM_DDR3L_MT41K256M16TW-107 IT:P" 81,43 r0 top locked
U701 "AT24C16" "TSSOP-8_PW (TI)" 100.25,214.5 r0 top
U702 "SN74LVC1G06DCKR" IC_SC-70-5 103.25,180 r0 top
U703 "MTFC32GAZAQHD-WT" IC_VFBGA-153 65.25,63.25 r270 top
U800 "LAN8710A-EZC-TR" "IC_QFN-32 (5x5)" 18.435,31.75 r270 top
U802 "SN74AHC1G09DBVR" "SOT-23-5 (TI DBV PACKAGE)" 29.5,41.5 r180 bottom
U900 "SN74LVC2G241DCUR" IC_VSSOP-8 112.75,131.5 r0 top
U902 "SN74LVC1G07DCKR" IC_SC-70-5 94,123 r0 top
U903 "CP2102-GMR" "QFN-28 (5x5mm)" 101,69.85 r270 top
X500 "SX2M24.000M20F30TNN" "OSC SMD_2.5x2.0 (SCTF)" 61.5,53 r0 top
X501 "SX2M32.768KM20F30TNN" "OSC SMD_2.5x2.0 (SCTF)" 70.55,26.405 r180 top
X800 "X322525MOB4SI" OSC_SMD_3.2x2.5(YXC) 134.75,162.5 r0 top

## Footprints (in the part's own frame and the unit in brackets; to place one, negate y for a bottom-side part, rotate by r counter-clockwise, add the part's x,y. Pads: shape width x height; smd on the part's side, far side on the other; paste and mask are expansions set on the pad)
"CAP 0603 (0201_INCH)" [mm] "Chip Capacitor, 2-Leads, Body 0.60x0.30mm, IPC Medium Density"
  rect 0.4x0.35 smd mask+0.04: 1(-0.31,0) 2(0.31,0)
  silkscreen extent -0.67,-0.33 0.67,0.33, body extent -0.3,-0.15 0.3,0.15, height 0.3
"CAP 1005 (0402_INCH)" [mm] "Chip Capacitor, 2-Leads, Body 1.02x0.51mm, IPC Medium Density"
  rect 0.6x0.64 smd mask+0.04: 1(-0.44,0) 2(0.44,0)
  silkscreen extent -1,-0.5 1,0.5, body extent -0.5,-0.26 0.5,0.26, height 0.52
"CAP 1608 (0603_INCH)" [mm] "Chip Capacitor, 2-Leads, Body 1.60x0.80mm, IPC Medium Density"
  rect 0.9x1 smd mask+0.04: 1(-0.675,0) 2(0.675,0)
  silkscreen extent -1.4,-0.7 1.4,0.7, body extent -0.8,-0.41 0.8,0.41, height 0.82
"CAP 2012 (0805_INCH)" [mm] "Chip Capacitor, 2-Leads, Body 2.00x1.20mm, IPC Medium Density"
  rect 1.3x1.4 smd mask+0.04: 1(-0.8,0) 2(0.8,0)
  silkscreen extent -1.7,-0.9 1.7,0.9, body extent -1,-0.64 1,0.64, height 1.26
"CON PIN_HEADER-4PIN(2.54MM)" [mm] "Pin Header 4P 2.54mm"
  round 1.8 hole 1: 1(0,0) 2(2.54,0) 3(5.08,0) 4(7.62,0)
  silkscreen extent -1.27,-1.25 8.89,1.25, body extent -1.27,-1.27 8.89,1.27, height 8.57
"CON USB-Type-C (16P)" [mm] "USB 2.0 5A 1 Surface Mount 16 Female -35占쏙옙~+75占쏙옙 Type-C SMD  USB Connectors ROHS"
  round 0 hole 0.65: 0(-2.89,1.45) 0(2.89,1.45)
  rect 0.6x1.15 smd mask+0.03: A1(-3.2,2.6) A4(-2.4,2.6) B1(3.2,2.6) B4(2.4,2.6)
  rect 0.3x1.15 smd mask+0.03: A5(-1.25,2.6) A6(-0.25,2.6) A7(0.25,2.6) A8(1.25,2.6) B5(1.75,2.6) B6(0.75,2.6) B7(-0.75,2.6) B8(-1.75,2.6)
  rect 2.18x2 smd mask+0.03: S1(-5.11,1.95) S2(-5.11,-1.95) S3(5.11,-1.95) S4(5.11,1.95)
  silkscreen extent -4.5,-4.8 4.5,0.7, body extent -5.65,-4.83 5.65,2.87, height 3.26